# EAGLE board lte_cat_m1_shield_sara-r4-Panel (EAGLE 9.1.2), part 1 of 3
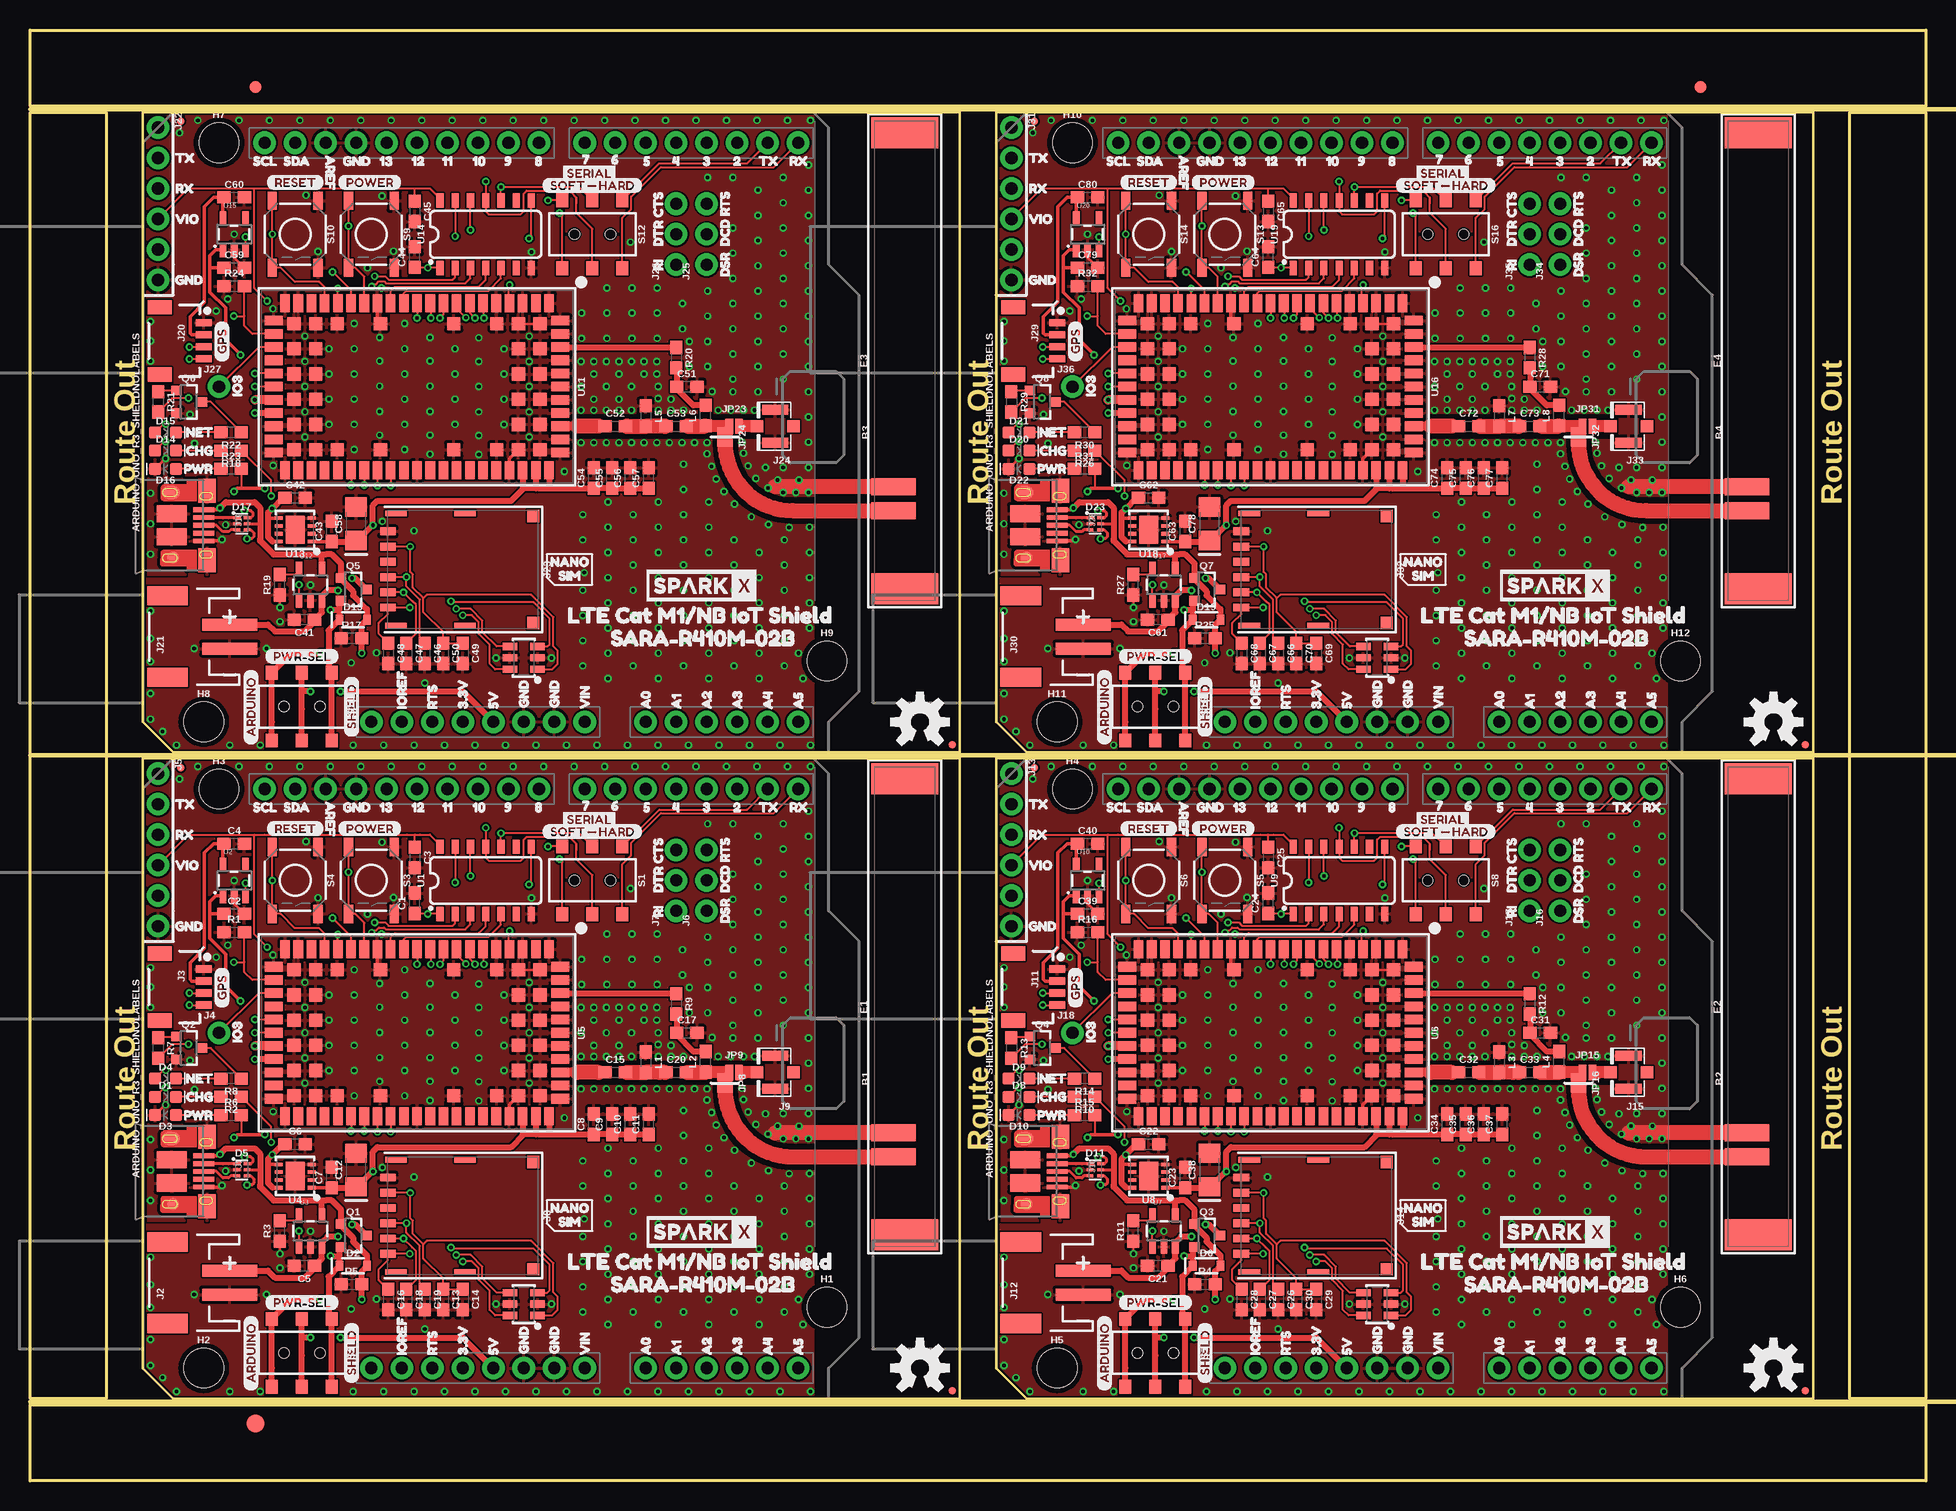
[diagram p0: board, top side]
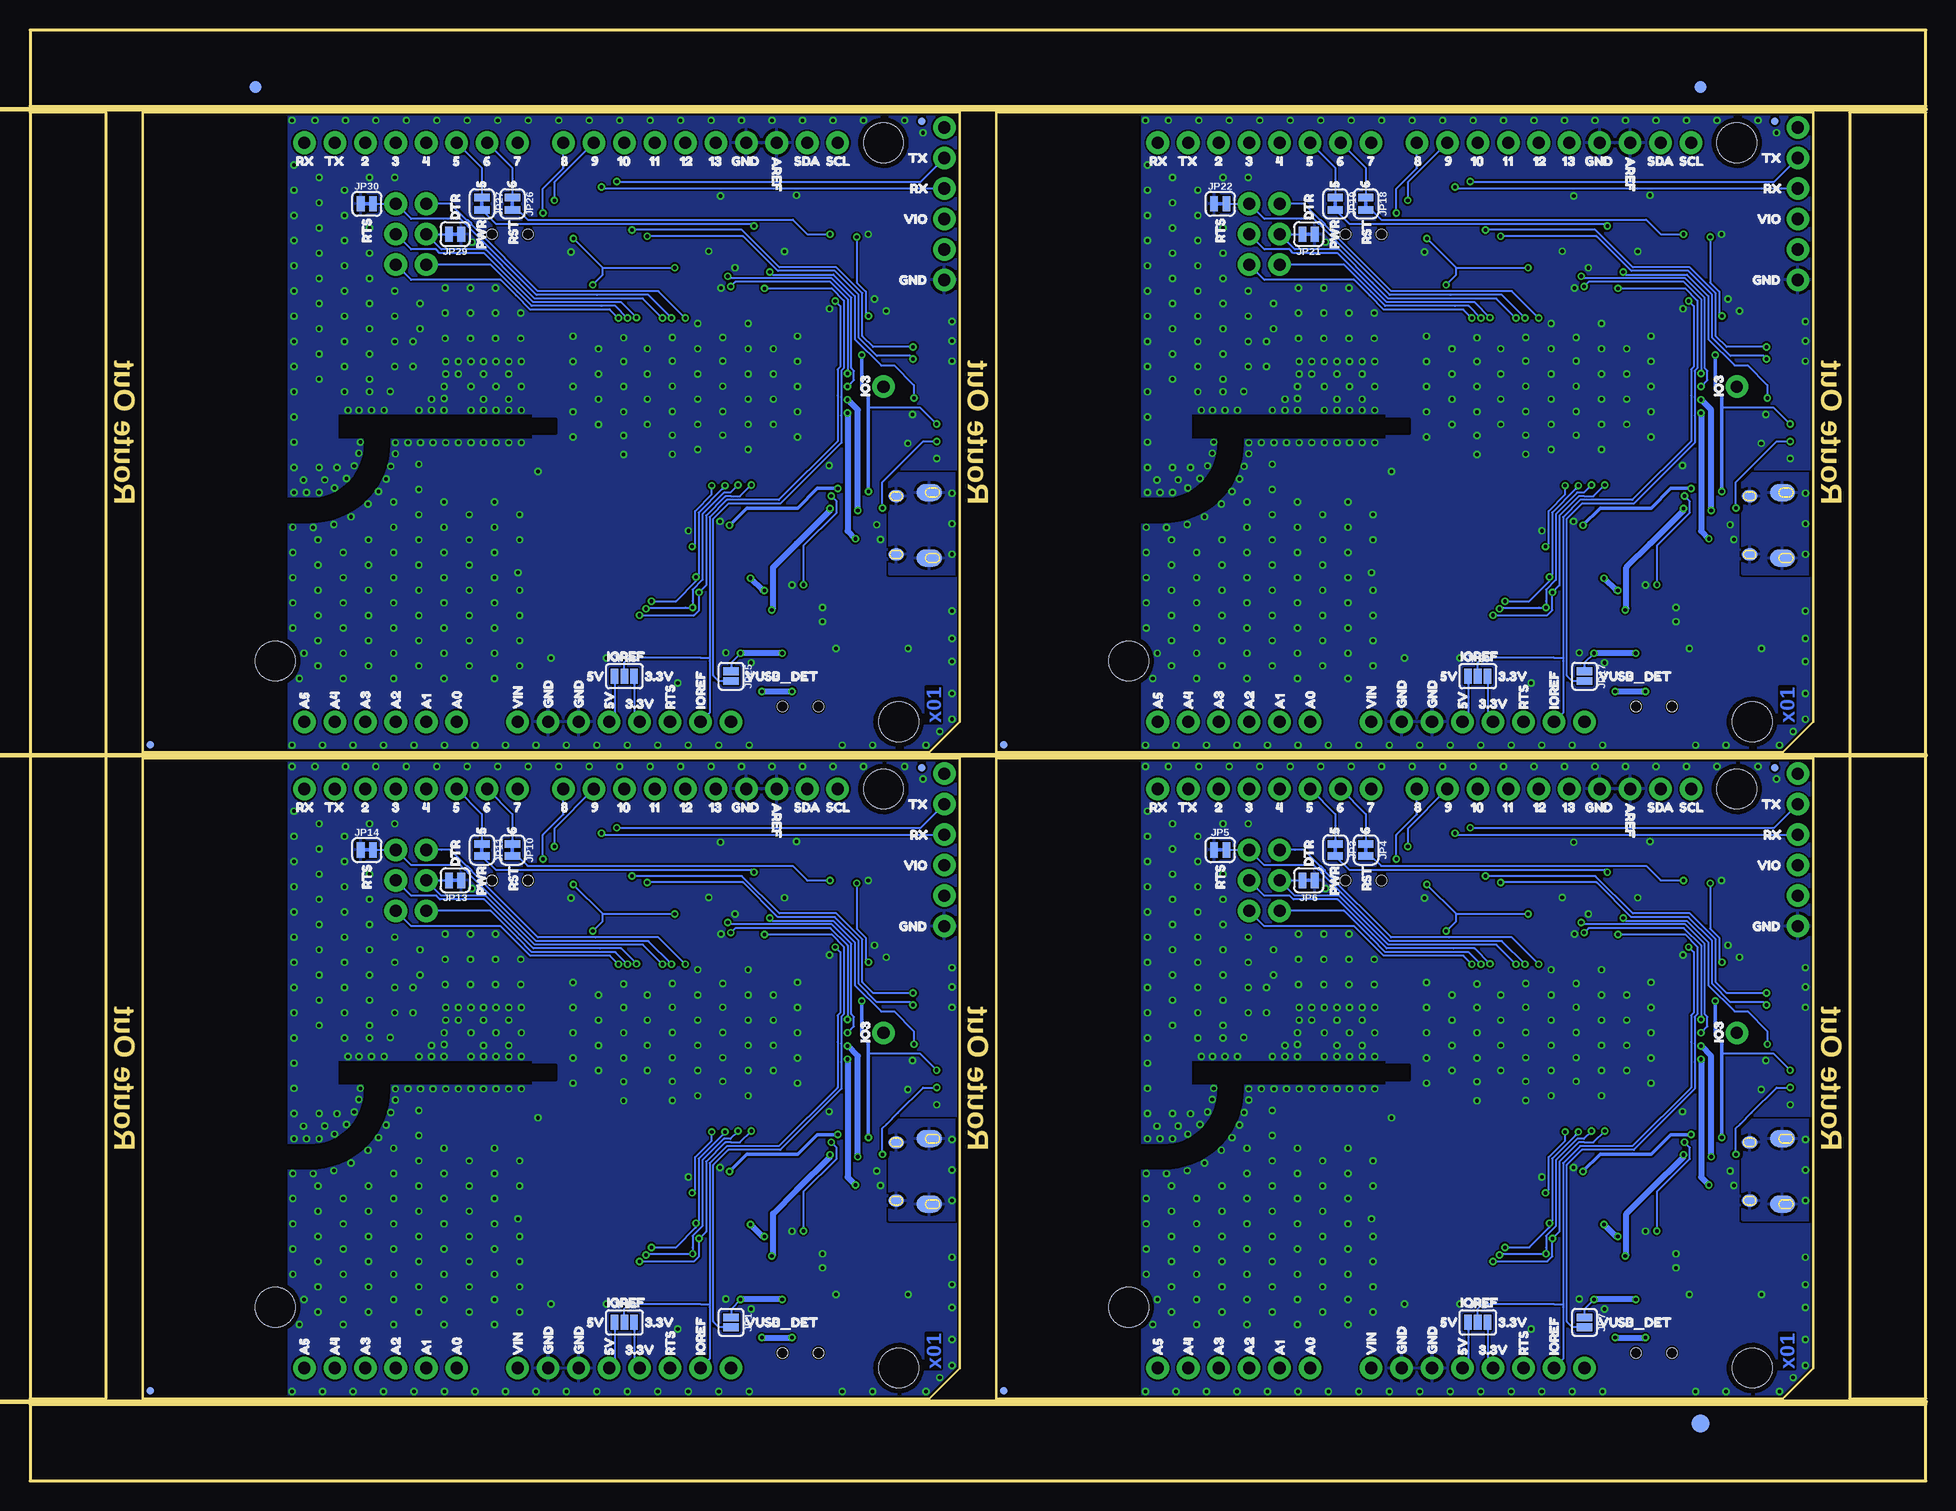
[diagram p1: board, bottom side, seen from below]

Size 157.99 x 120.9 mm. Coordinates in mm from the lower left corner, seen from the top.
Outline: 9.4,9.4 11.94,6.86 77.47,6.86 77.47,60.2 9.4,60.2 9.4,9.4
Outline: 80.52,9.4 83.06,6.86 148.59,6.86 148.59,60.2 80.52,60.2 80.52,9.4
Outline: 9.4,63.25 11.94,60.71 77.47,60.71 77.47,114.05 9.4,114.05 9.4,63.25
Outline: 80.52,63.25 83.06,60.71 148.59,60.71 148.59,114.05 80.52,114.05 80.52,63.25
Outline: 0,6.35 157.99,6.35 157.99,0 0,0 0,6.35
Outline: 151.64,114.05 157.99,114.05 157.99,6.86 151.64,6.86 151.64,114.05
Outline: 0,120.9 157.99,120.9 157.99,114.55 0,114.55 0,120.9
Outline: 0,114.05 6.35,114.05 6.35,6.86 0,6.86 0,114.05
Copper layers (1*16): Top 0.035mm / dielectric 1.5mm / Bottom 0.035mm
Design rules "SparkFun-2-layer-PCBWay-LIMIT": minimum track width 6mil, minimum drill 0.3mm, track to track 6mil, track to pad 6mil, pad to pad 6mil, via to via 6mil, smd to smd 6mil, copper to edge 6mil, drill to drill 6mil, minimum pad ring 6mil, minimum via ring 6mil, stop-mask expansion 4mil, vias tented up to drill 25mil, thermal gap 10mil
Net classes: 1 USB_Data: width 0.152 mm, drill 0.305 mm, clearance 0.152 mm
Milling: 3 lines

## Footprints (pad centres in the part's own frame; a part is rotated, then mirrored left to right if it is on the bottom)
UNO_R3_SHIELD_NOLABELS = drill 1.016 pad 1.88: 3.3V 24.13,-3.81; 5V 24.13,-1.27; A0 24.13,11.43; A1 24.13,13.97; A2 24.13,16.51; A3 24.13,19.05; A4 24.13,21.59; A5 24.13,24.13; AREF -24.13,-15.24; D2 -24.13,19.05; D3 -24.13,16.51; D4 -24.13,13.97; D5 -24.13,11.43; D6 -24.13,8.89; D7 -24.13,6.35; D8 -24.13,2.54; D9 -24.13,0; D10 -24.13,-2.54; D11 -24.13,-5.08; D12 -24.13,-7.62; D13 -24.13,-10.16; GND@0 24.13,1.27; GND@1 24.13,3.81; GND@2 -24.13,-12.7; IOREF 24.13,-8.89; NC 24.13,-11.43; RES 24.13,-6.35; RX -24.13,24.13; SCL -24.13,-20.32; SDA -24.13,-17.78; TX -24.13,21.59; VIN 24.13,6.35
0603 = smd 1.1 x 1: 1 -0.85,0; 2 0.85,0
1206-POLAR = smd 1.6 x 1.8: 1 -1.4,0; 2 1.4,0
LED-0603 = smd 1 x 1: A -0.877,0; C 0.877,0
SOD-323 = smd 0.63 x 0.83: A 1.15,0; C -1.15,0
SOT886 = smd 0.61 x 0.25: 1 -0.405,0.5 | smd 0.56 x 0.25: 2 -0.43,0; 3 -0.43,-0.5; 4 0.43,-0.5; 5 0.43,0; 6 0.43,0.5
SOT23-6L = smd 0.6 x 1.2: 1 -0.95,-1.15; 2 0,-1.15; 3 0.95,-1.15; 4 0.95,1.15; 5 0,1.15; 6 -0.95,1.15
MOLEX_146200 = smd 1.4 x 3.7: FEED 12.5,-0.95; GND 10.5,-0.95 | smd 2.6 x 5.6: MNT1 -19,0; MNT2 19,0
FIDUCIAL-1X2 = smd 1 x 1: 1 0,0
FIDUCIAL-1.5X3 = smd 1.5 x 1.5: 1 0,0
FIDUCIAL-MICRO = smd 0.635 x 0.635: 1 0,0
STAND-OFF = hole 3.302: 0,0
USB-MICROB-PTH-MILL = smd 0.4 x 1.75: D+ 0,0; D- -0.65,0; GND 1.3,0; ID 0.65,0; VBUS -1.3,0 | smd 2 x 1.46: SHIELD -2.9,0.275; SHIELD2 2.9,0.275 | smd 1.425 x 2.5: SHIELD3 -0.963,-2.675; SHIELD4 0.963,-2.675 | smd 1.4 x 2.1 bottom: SHIELD5 -2.731,-2.531; SHIELD7 2.729,-2.531 | smd 1 x 1: SHIELD6 2.7,-2.575 | smd 1.1 x 1.5: SHIELD8 -2.731,-2.731 | smd 1 x 1.3 bottom: SHIELD9 -2.43,0.195; SHIELD10 2.43,0.195
JST-2-SMD = smd 1 x 4.6: 1 -1,-3.7; 2 1,-3.7 | smd 1.6 x 3.4: NC1 -3.4,1.5; NC2 3.4,1.5
1X04_1MM_RA = smd 0.6 x 1.35: 1 -1.5,0; 2 -0.5,0; 3 0.5,0; 4 1.5,0 | smd 1.2 x 2: NC1 2.8,-3.675; NC2 -2.8,-3.675
1X01_NO_SILK = drill 1.016 pad 1.88: 1 0,0
1X06_NO_SILK = drill 1.016 pad 1.88: 1 0,0; 2 2.54,0; 3 5.08,0; 4 7.62,0; 5 10.16,0; 6 12.7,0
1X03_NO_SILK = drill 1.016 pad 1.88: 1 0,0; 2 2.54,0; 3 5.08,0
NANO_SIM_WURTH_693043020611 = smd 0.65 x 1.3: C1 1.905,6.25; C2 -0.635,6.25; C3 -1.905,6.25; C5 3.175,6.25; C6 0.635,6.25; C7 -3.175,6.25 | smd 0.48 x 1.8: MNT1 -4.69,5.58; MNT2 4.66,5.58; MNT3 -4.69,-0.17; MNT4 4.66,-0.17 | smd 1.03 x 1: MNT5 -4.465,-5.89; MNT6 4.465,-5.89
U.FL = smd 2.2 x 0.85: 1 0,1.375; 2 0,-1.375 | smd 1.05 x 1: FEED 1.525,0; NC -1.525,0
SMT-JUMPER_2_NO_SILK = smd 0.635 x 1.27: 1 -0.406,0; 2 0.406,0
SMT-JUMPER_3_NO_SILK = smd 0.635 x 1.27: 1 -0.813,0; 2 0,0; 3 0.813,0
SMT-JUMPER_2_NC_TRACE_SILK = smd 0.635 x 1.27: 1 -0.508,0; 2 0.508,0
SMT-JUMPER_2_NC_TRACE_NO-SILK = smd 0.635 x 1.27: 1 -0.508,0; 2 0.508,0
SMT-JUMPER_2_NO_NO-SILK = smd 0.635 x 1.27: 1 -0.406,0; 2 0.406,0
SOT23-3 = smd 0.8 x 0.9: 1 -0.95,-1; 2 0.95,-1; 3 0,1.1
SWITCH_DPDT_SMD_AYZ0202 = smd 1 x 1.15: 1 -2.5,2.825; 2 0,2.825; 3 2.5,2.825; 4 -2.5,-2.825; 5 0,-2.825; 6 2.5,-2.825 | hole 0.85: 1.5,0; -1.5,0
TACTILE_SWITCH_SMD_5.2MM = smd 1.524 x 0.762: 1 -2.794,1.905; 2 2.794,1.905; 3 -2.794,-1.905; 4 2.794,-1.905
SO14 = smd 0.6 x 1.2: 1 -3.81,-2.8; 2 -2.54,-2.8; 3 -1.27,-2.8; 4 0,-2.8; 5 1.27,-2.8; 6 2.54,-2.8; 7 3.81,-2.8; 8 3.81,2.8; 9 2.54,2.8; 10 1.27,2.8; 11 0,2.8; 12 -1.27,2.8; 13 -2.54,2.8; 14 -3.81,2.8
SOT23-5 = smd 0.55 x 1.2: 1 -0.95,-1.3; 2 0,-1.3; 3 0.95,-1.3; 4 0.95,1.3; 5 -0.95,1.3
8-UDFN = smd 0.3 x 0.65: 1 -0.975,-1.375; 2 -0.325,-1.375; 3 0.325,-1.375; 4 0.975,-1.375; 5 0.975,1.375; 6 0.325,1.375; 7 -0.325,1.375; 8 -0.975,1.375 | smd 2.35 x 1.6: EP 0,0
SARA-LGA = smd 0.8 x 1.5: 1 -11,-6.95; 2 -9.9,-6.95; 3 -8.8,-6.95; 4 -7.7,-6.95; 5 -6.6,-6.95; 6 -5.5,-6.95; 7 -4.4,-6.95; 8 -3.3,-6.95; 9 -2.2,-6.95; 10 -1.1,-6.95; 11 0,-6.95; 12 1.1,-6.95; 13 2.2,-6.95; 14 3.3,-6.95; 15 4.4,-6.95; 16 5.5,-6.95; 17 6.6,-6.95; 18 7.7,-6.95; 19 8.8,-6.95; 20 9.9,-6.95; 21 11,-6.95; 33 11,6.95; 34 9.9,6.95; 35 8.8,6.95; 36 7.7,6.95; 37 6.6,6.95; 38 5.5,6.95; 39 4.4,6.95; 40 3.3,6.95; 41 2.2,6.95; 42 1.1,6.95; 43 0,6.95; 44 -1.1,6.95; 45 -2.2,6.95; 46 -3.3,6.95; 47 -4.4,6.95; 48 -5.5,6.95; 49 -6.6,6.95; 50 -7.7,6.95; 51 -8.8,6.95; 52 -9.9,6.95; 53 -11,6.95 | smd 1.5 x 0.8: 22 11.95,-5.5; 23 11.95,-4.4; 24 11.95,-3.3; 25 11.95,-2.2; 26 11.95,-1.1; 27 11.95,0; 28 11.95,1.1; 29 11.95,2.2; 30 11.95,3.3; 31 11.95,4.4; 32 11.95,5.5; 54 -11.95,5.5; 55 -11.95,4.4; 56 -11.95,3.3; 57 -11.95,2.2; 58 -11.95,1.1; 59 -11.95,0; 60 -11.95,-1.1; 61 -11.95,-2.2; 62 -11.95,-3.3; 63 -11.95,-4.4; 64 -11.95,-5.5 | smd 1.1 x 1.1: 65 -10.25,-5.25; 66 -10.25,-3.15; 67 -10.25,-1.05; 68 -10.25,1.05; 69 -10.25,3.15; 70 -10.25,5.25; 71 -8.45,-5.25; 72 -8.45,-3.15; 73 -8.45,-1.05; 74 -8.45,1.05; 75 -8.45,3.15; 76 -8.45,5.25; 77 -6.65,-5.25; 78 -6.65,5.25; 79 -3.05,-5.25; 80 -3.05,5.25; 81 3.05,-5.25; 82 3.05,5.25; 83 6.65,-5.25; 84 6.65,5.25; 85 8.45,-5.25; 86 8.45,-3.15; 87 8.45,-1.05; 88 8.45,1.05; 89 8.45,3.15; 90 8.45,5.25; 91 10.25,-5.25; 92 10.25,-3.15; 93 10.25,-1.05; 94 10.25,1.05; 95 10.25,3.15; 96 10.25,5.25

## Placement (x,y rotation side)
B1  ARDUINO_UNO_R3_SHIELDNOLABELS  [UNO_R3_SHIELD_NOLABELS]  39.88,33.53 270 top
B2  ARDUINO_UNO_R3_SHIELDNOLABELS  [UNO_R3_SHIELD_NOLABELS]  111,33.53 270 top
B3  ARDUINO_UNO_R3_SHIELDNOLABELS  [UNO_R3_SHIELD_NOLABELS]  39.88,87.38 270 top
B4  ARDUINO_UNO_R3_SHIELDNOLABELS  [UNO_R3_SHIELD_NOLABELS]  111,87.38 270 top
C1  0.1uF  [0603]  32.06,48.13 90 top
C2  1.0uF  [0603]  17.02,47.24 0 top
C3  0.1uF  [0603]  32.06,51.94 270 top
C4  1.0uF  [0603]  17.02,53.11 0 top
C5  4.7uF  [0603]  22.86,17.91 180 top
C6  4.7uF  [0603]  22.1,28.07 0 top
C7  4.7uF  [0603]  25.15,25.27 90 top
C8  0.1uF  [0603]  46.99,29.72 90 top
C9  10nF  [0603]  48.51,29.72 90 top
C10  15pF  [0603]  50.04,29.72 90 top
C11  68pF  [0603]  51.56,29.72 90 top
C12  100uF  [1206-POLAR]  27.18,25.91 90 top
C13  0.1uF  [0603]  34.42,15.11 270 top
C14  47pF  [0603]  36.07,15.11 270 top
C15  15pF  [0603]  48.77,34.04 0 top
C16  47pF  [0603]  29.84,15.11 270 top
C17  27pF  [0603]  54.74,37.34 0 top
C18  47pF  [0603]  31.37,15.11 270 top
C19  47pF  [0603]  32.89,15.11 270 top
C20  33pF  [0603]  53.85,34.04 0 top
C21  4.7uF  [0603]  93.98,17.91 180 top
C22  4.7uF  [0603]  93.22,28.07 0 top
C23  4.7uF  [0603]  96.27,25.27 90 top
C24  0.1uF  [0603]  103.18,48.13 90 top
C25  0.1uF  [0603]  103.18,51.94 270 top
C26  47pF  [0603]  104.01,15.11 270 top
C27  47pF  [0603]  102.49,15.11 270 top
C28  47pF  [0603]  100.96,15.11 270 top
C29  47pF  [0603]  107.19,15.11 270 top
C30  0.1uF  [0603]  105.54,15.11 270 top
C31  27pF  [0603]  125.86,37.34 0 top
C32  15pF  [0603]  119.89,34.04 0 top
C33  33pF  [0603]  124.97,34.04 0 top
C34  0.1uF  [0603]  118.11,29.72 90 top
C35  10nF  [0603]  119.63,29.72 90 top
C36  15pF  [0603]  121.16,29.72 90 top
C37  68pF  [0603]  122.68,29.72 90 top
C38  100uF  [1206-POLAR]  98.3,25.91 90 top
C39  1.0uF  [0603]  88.14,47.24 0 top
C40  1.0uF  [0603]  88.14,53.11 0 top
C41  4.7uF  [0603]  22.86,71.76 180 top
C42  4.7uF  [0603]  22.1,81.92 0 top
C43  4.7uF  [0603]  25.15,79.12 90 top
C44  0.1uF  [0603]  32.06,101.98 90 top
C45  0.1uF  [0603]  32.06,105.79 270 top
C46  47pF  [0603]  32.89,68.96 270 top
C47  47pF  [0603]  31.37,68.96 270 top
C48  47pF  [0603]  29.84,68.96 270 top
C49  47pF  [0603]  36.07,68.96 270 top
C50  0.1uF  [0603]  34.42,68.96 270 top
C51  27pF  [0603]  54.74,91.19 0 top
C52  15pF  [0603]  48.77,87.89 0 top
C53  33pF  [0603]  53.85,87.89 0 top
C54  0.1uF  [0603]  46.99,83.57 90 top
C55  10nF  [0603]  48.51,83.57 90 top
C56  15pF  [0603]  50.04,83.57 90 top
C57  68pF  [0603]  51.56,83.57 90 top
C58  100uF  [1206-POLAR]  27.18,79.76 90 top
C59  1.0uF  [0603]  17.02,101.09 0 top
C60  1.0uF  [0603]  17.02,106.96 0 top
C61  4.7uF  [0603]  93.98,71.76 180 top
C62  4.7uF  [0603]  93.22,81.92 0 top
C63  4.7uF  [0603]  96.27,79.12 90 top
C64  0.1uF  [0603]  103.18,101.98 90 top
C65  0.1uF  [0603]  103.18,105.79 270 top
C66  47pF  [0603]  104.01,68.96 270 top
C67  47pF  [0603]  102.49,68.96 270 top
C68  47pF  [0603]  100.96,68.96 270 top
C69  47pF  [0603]  107.19,68.96 270 top
C70  0.1uF  [0603]  105.54,68.96 270 top
C71  27pF  [0603]  125.86,91.19 0 top
C72  15pF  [0603]  119.89,87.89 0 top
C73  33pF  [0603]  124.97,87.89 0 top
C74  0.1uF  [0603]  118.11,83.57 90 top
C75  10nF  [0603]  119.63,83.57 90 top
C76  15pF  [0603]  121.16,83.57 90 top
C77  68pF  [0603]  122.68,83.57 90 top
C78  100uF  [1206-POLAR]  98.3,79.76 90 top
C79  1.0uF  [0603]  88.14,101.09 0 top
C80  1.0uF  [0603]  88.14,106.96 0 top
D1  Yellow  [LED-0603]  11.3,32 0 top
D2  1A/23V/620mV  [SOD-323]  26.92,17.91 0 top
D3  RED  [LED-0603]  11.3,30.48 180 top
D4  BLUE  [LED-0603]  11.3,33.53 0 top
D5  PRTR5V0U2F  [SOT886]  17.65,25.91 0 top
D6  1A/23V/620mV  [SOD-323]  98.04,17.91 0 top
D7  DT1042-04SO-7  [SOT23-6L]  41.15,14.73 90 top
D8  Yellow  [LED-0603]  82.42,32 0 top
D9  BLUE  [LED-0603]  82.42,33.53 0 top
D10  RED  [LED-0603]  82.42,30.48 180 top
D11  PRTR5V0U2F  [SOT886]  88.77,25.91 0 top
D12  DT1042-04SO-7  [SOT23-6L]  112.27,14.73 90 top
D13  1A/23V/620mV  [SOD-323]  26.92,71.76 0 top
D14  Yellow  [LED-0603]  11.3,85.85 0 top
D15  BLUE  [LED-0603]  11.3,87.38 0 top
D16  RED  [LED-0603]  11.3,84.33 180 top
D17  PRTR5V0U2F  [SOT886]  17.65,79.76 0 top
D18  DT1042-04SO-7  [SOT23-6L]  41.15,68.58 90 top
D19  1A/23V/620mV  [SOD-323]  98.04,71.76 0 top
D20  Yellow  [LED-0603]  82.42,85.85 0 top
D21  BLUE  [LED-0603]  82.42,87.38 0 top
D22  RED  [LED-0603]  82.42,84.33 180 top
D23  PRTR5V0U2F  [SOT886]  88.77,79.76 0 top
D24  DT1042-04SO-7  [SOT23-6L]  112.27,68.58 90 top
E1  MOLEX-146200  [MOLEX_146200]  72.9,39.5 270 top
E2  MOLEX-146200  [MOLEX_146200]  144.02,39.5 270 top
E3  MOLEX-146200  [MOLEX_146200]  72.9,93.34 270 top
E4  MOLEX-146200  [MOLEX_146200]  144.02,93.34 270 top
E$1  [FIDUCIAL-1X2]  18.8,116.14 0 top
E$2  [FIDUCIAL-1X2]  18.8,116.14 0 bottom
E$3  [FIDUCIAL-1X2]  139.19,116.14 0 top
E$4  [FIDUCIAL-1X2]  139.19,116.14 0 bottom
E$5  [FIDUCIAL-1.5X3]  18.8,4.76 0 top
E$6  [FIDUCIAL-1.5X3]  18.8,4.76 0 bottom
FD1  FIDUCIALUFIDUCIAL  [FIDUCIAL-MICRO]  76.83,7.49 0 top
FD2  FIDUCIALUFIDUCIAL  [FIDUCIAL-MICRO]  12.57,59.44 0 top
FD3  FIDUCIALUFIDUCIAL  [FIDUCIAL-MICRO]  76.83,7.49 0 bottom
FD4  FIDUCIALUFIDUCIAL  [FIDUCIAL-MICRO]  12.57,59.44 0 bottom
FD5  FIDUCIALUFIDUCIAL  [FIDUCIAL-MICRO]  147.95,7.49 0 top
FD6  FIDUCIALUFIDUCIAL  [FIDUCIAL-MICRO]  83.69,59.44 0 top
FD7  FIDUCIALUFIDUCIAL  [FIDUCIAL-MICRO]  147.95,7.49 0 bottom
FD8  FIDUCIALUFIDUCIAL  [FIDUCIAL-MICRO]  83.69,59.44 0 bottom
FD9  FIDUCIALUFIDUCIAL  [FIDUCIAL-MICRO]  76.83,61.34 0 top
FD10  FIDUCIALUFIDUCIAL  [FIDUCIAL-MICRO]  12.57,113.28 0 top
FD11  FIDUCIALUFIDUCIAL  [FIDUCIAL-MICRO]  76.83,61.34 0 bottom
FD12  FIDUCIALUFIDUCIAL  [FIDUCIAL-MICRO]  12.57,113.28 0 bottom
FD13  FIDUCIALUFIDUCIAL  [FIDUCIAL-MICRO]  147.95,61.34 0 top
FD14  FIDUCIALUFIDUCIAL  [FIDUCIAL-MICRO]  83.69,113.28 0 top
FD15  FIDUCIALUFIDUCIAL  [FIDUCIAL-MICRO]  147.95,61.34 0 bottom
FD16  FIDUCIALUFIDUCIAL  [FIDUCIAL-MICRO]  83.69,113.28 0 bottom
H1  STAND-OFF  [STAND-OFF]  66.42,14.48 0 top
H2  STAND-OFF  [STAND-OFF]  14.48,9.4 0 top
H3  STAND-OFF  [STAND-OFF]  15.75,57.66 0 top
H4  STAND-OFF  [STAND-OFF]  86.87,57.66 0 top
H5  STAND-OFF  [STAND-OFF]  85.6,9.4 0 top
H6  STAND-OFF  [STAND-OFF]  137.54,14.48 0 top
H7  STAND-OFF  [STAND-OFF]  15.75,111.51 0 top
H8  STAND-OFF  [STAND-OFF]  14.48,63.25 0 top
H9  STAND-OFF  [STAND-OFF]  66.42,68.33 0 top
H10  STAND-OFF  [STAND-OFF]  86.87,111.51 0 top
H11  STAND-OFF  [STAND-OFF]  85.6,63.25 0 top
H12  STAND-OFF  [STAND-OFF]  137.54,68.33 0 top
J1  [USB-MICROB-PTH-MILL]  14.48,25.78 270 top
J2  [JST-2-SMD]  12.95,16.51 90 top
J3  [1X04_1MM_RA]  14.48,41.15 270 top
J4  [1X01_NO_SILK]  15.75,37.34 0 top
J5  [1X06_NO_SILK]  10.67,58.93 270 top
J6  [1X03_NO_SILK]  56.39,47.5 90 top
J7  [1X03_NO_SILK]  53.85,47.5 90 top
J8  NANO_SIM  [NANO_SIM_WURTH_693043020611]  36.07,22.1 90 top
J9  U.FL  [U.FL]  62.1,34.04 180 top
J10  [USB-MICROB-PTH-MILL]  85.6,25.78 270 top
J11  [1X04_1MM_RA]  85.6,41.15 270 top
J12  [JST-2-SMD]  84.07,16.51 90 top
J13  [1X06_NO_SILK]  81.79,58.93 270 top
J14  NANO_SIM  [NANO_SIM_WURTH_693043020611]  107.19,22.1 90 top
J15  U.FL  [U.FL]  133.22,34.04 180 top
J16  [1X03_NO_SILK]  127.51,47.5 90 top
J17  [1X03_NO_SILK]  124.97,47.5 90 top
J18  [1X01_NO_SILK]  86.87,37.34 0 top
J19  [USB-MICROB-PTH-MILL]  14.48,79.63 270 top
J20  [1X04_1MM_RA]  14.48,95 270 top
J21  [JST-2-SMD]  12.95,70.36 90 top
J22  [1X06_NO_SILK]  10.67,112.78 270 top
J23  NANO_SIM  [NANO_SIM_WURTH_693043020611]  36.07,75.95 90 top
J24  U.FL  [U.FL]  62.1,87.89 180 top
J25  [1X03_NO_SILK]  56.39,101.35 90 top
J26  [1X03_NO_SILK]  53.85,101.35 90 top
J27  [1X01_NO_SILK]  15.75,91.19 0 top
J28  [USB-MICROB-PTH-MILL]  85.6,79.63 270 top
J29  [1X04_1MM_RA]  85.6,95 270 top
J30  [JST-2-SMD]  84.07,70.36 90 top
J31  [1X06_NO_SILK]  81.79,112.78 270 top
J32  NANO_SIM  [NANO_SIM_WURTH_693043020611]  107.19,75.95 90 top
J33  U.FL  [U.FL]  133.22,87.89 180 top
J34  [1X03_NO_SILK]  127.51,101.35 90 top
J35  [1X03_NO_SILK]  124.97,101.35 90 top
J36  [1X01_NO_SILK]  86.87,91.19 0 top
JP1  VUSB_DET  [SMT-JUMPER_2_NO_SILK]  99.57,13.21 270 bottom
JP2  IOREF-SEL  [SMT-JUMPER_3_NO_SILK]  37.34,13.21 0 bottom
JP3  JUMPER-SMT_2_NC_TRACE_SILK  [SMT-JUMPER_2_NC_TRACE_SILK]  49.21,52.58 270 bottom
JP4  JUMPER-SMT_2_NC_TRACE_SILK  [SMT-JUMPER_2_NC_TRACE_SILK]  46.67,52.58 270 bottom
JP5  [SMT-JUMPER_2_NC_TRACE_SILK]  58.8,52.58 0 bottom
JP6  [SMT-JUMPER_2_NC_TRACE_SILK]  51.44,50.04 180 bottom
JP7  VUSB_DET  [SMT-JUMPER_2_NO_SILK]  28.45,13.21 270 bottom
JP8  J-CHIP  [SMT-JUMPER_2_NC_TRACE_NO-SILK]  57.91,33.15 270 top
JP9  J-U.FL  [SMT-JUMPER_2_NO_NO-SILK]  58.67,34.03 0 top
JP10  JUMPER-SMT_2_NC_TRACE_SILK  [SMT-JUMPER_2_NC_TRACE_SILK]  117.79,52.58 270 bottom
JP11  JUMPER-SMT_2_NC_TRACE_SILK  [SMT-JUMPER_2_NC_TRACE_SILK]  120.33,52.58 270 bottom
JP12  IOREF-SEL  [SMT-JUMPER_3_NO_SILK]  108.46,13.21 0 bottom
JP13  [SMT-JUMPER_2_NC_TRACE_SILK]  122.55,50.04 180 bottom
JP14  [SMT-JUMPER_2_NC_TRACE_SILK]  129.92,52.58 0 bottom
JP15  J-U.FL  [SMT-JUMPER_2_NO_NO-SILK]  129.79,34.03 0 top
JP16  J-CHIP  [SMT-JUMPER_2_NC_TRACE_NO-SILK]  129.03,33.15 270 top
JP17  VUSB_DET  [SMT-JUMPER_2_NO_SILK]  28.45,67.06 270 bottom
JP18  JUMPER-SMT_2_NC_TRACE_SILK  [SMT-JUMPER_2_NC_TRACE_SILK]  46.67,106.43 270 bottom
JP19  JUMPER-SMT_2_NC_TRACE_SILK  [SMT-JUMPER_2_NC_TRACE_SILK]  49.21,106.43 270 bottom
JP20  IOREF-SEL  [SMT-JUMPER_3_NO_SILK]  37.34,67.06 0 bottom
JP21  [SMT-JUMPER_2_NC_TRACE_SILK]  51.44,103.89 180 bottom
JP22  [SMT-JUMPER_2_NC_TRACE_SILK]  58.8,106.43 0 bottom
JP23  J-U.FL  [SMT-JUMPER_2_NO_NO-SILK]  58.67,87.88 0 top
JP24  J-CHIP  [SMT-JUMPER_2_NC_TRACE_NO-SILK]  57.91,87 270 top
JP25  VUSB_DET  [SMT-JUMPER_2_NO_SILK]  99.57,67.06 270 bottom
JP26  JUMPER-SMT_2_NC_TRACE_SILK  [SMT-JUMPER_2_NC_TRACE_SILK]  117.79,106.43 270 bottom
JP27  JUMPER-SMT_2_NC_TRACE_SILK  [SMT-JUMPER_2_NC_TRACE_SILK]  120.33,106.43 270 bottom
JP28  IOREF-SEL  [SMT-JUMPER_3_NO_SILK]  108.46,67.06 0 bottom
JP29  [SMT-JUMPER_2_NC_TRACE_SILK]  122.55,103.89 180 bottom
JP30  [SMT-JUMPER_2_NC_TRACE_SILK]  129.92,106.43 0 bottom
JP31  J-U.FL  [SMT-JUMPER_2_NO_NO-SILK]  129.79,87.88 0 top
JP32  J-CHIP  [SMT-JUMPER_2_NC_TRACE_NO-SILK]  129.03,87 270 top
L1  39nH  [0603]  51.31,34.88 270 top
L2  68nH  [0603]  56.3,34.92 90 top
L3  39nH  [0603]  122.43,34.88 270 top
L4  68nH  [0603]  127.42,34.92 90 top
L5  39nH  [0603]  51.31,88.73 270 top
L6  68nH  [0603]  56.3,88.77 90 top
L7  39nH  [0603]  122.43,88.73 270 top
L8  68nH  [0603]  127.42,88.77 90 top
LOGO1  SPARKX-LOGO4  [SPARKX-MEDIUM]  55.96,20.75 0 top
LOGO2  OSHW-LOGOM  [OSHW-LOGO-M]  74.17,9.4 0 top
LOGO3  SPARKX-LOGO4  [SPARKX-MEDIUM]  127.08,20.75 0 top
LOGO4  OSHW-LOGOM  [OSHW-LOGO-M]  145.29,9.4 0 top
LOGO5  SPARKX-LOGO4  [SPARKX-MEDIUM]  55.96,74.6 0 top
LOGO6  OSHW-LOGOM  [OSHW-LOGO-M]  74.17,63.25 0 top
LOGO7  SPARKX-LOGO4  [SPARKX-MEDIUM]  127.08,74.6 0 top
LOGO8  OSHW-LOGOM  [OSHW-LOGO-M]  145.29,63.25 0 top
Q1  2.5A/30V/105mΩ  [SOT23-3]  26.92,20.45 270 top
Q2  600mA/40V  [SOT23-3]  13.21,36.07 270 top
Q3  2.5A/30V/105mΩ  [SOT23-3]  98.04,20.45 270 top
Q4  600mA/40V  [SOT23-3]  84.33,36.07 270 top
Q5  2.5A/30V/105mΩ  [SOT23-3]  26.92,74.3 270 top
Q6  600mA/40V  [SOT23-3]  13.21,89.92 270 top
Q7  2.5A/30V/105mΩ  [SOT23-3]  98.04,74.3 270 top
Q8  600mA/40V  [SOT23-3]  84.33,89.92 270 top
R1  47k  [0603]  17.02,45.72 0 top
R2  1k  [0603]  16.76,32 180 top
R3  2.0k  [0603]  20.83,20.83 90 top
R4  10k  [0603]  97.92,16.38 0 top
R5  10k  [0603]  26.8,16.38 0 top
R6  1k  [0603]  16.76,30.48 0 top
R7  10k  [0603]  10.67,36.07 270 top
R8  1k  [0603]  16.76,33.53 180 top
R9  10k  [0603]  53.85,39.75 270 top
R10  1k  [0603]  87.88,32 180 top
R11  2.0k  [0603]  91.95,20.83 90 top
R12  10k  [0603]  124.97,39.75 270 top
R13  10k  [0603]  81.79,36.07 270 top
R14  1k  [0603]  87.88,33.53 180 top
R15  1k  [0603]  87.88,30.48 0 top
R16  47k  [0603]  88.14,45.72 0 top
R17  10k  [0603]  26.8,70.23 0 top
R18  1k  [0603]  16.76,85.85 180 top
R19  2.0k  [0603]  20.83,74.68 90 top
R20  10k  [0603]  53.85,93.6 270 top
R21  10k  [0603]  10.67,89.92 270 top
R22  1k  [0603]  16.76,87.38 180 top
R23  1k  [0603]  16.76,84.33 0 top
R24  47k  [0603]  17.02,99.57 0 top
R25  10k  [0603]  97.92,70.23 0 top
R26  1k  [0603]  87.88,85.85 180 top
R27  2.0k  [0603]  91.95,74.68 90 top
R28  10k  [0603]  124.97,93.6 270 top
R29  10k  [0603]  81.79,89.92 270 top
R30  1k  [0603]  87.88,87.38 180 top
R31  1k  [0603]  87.88,84.33 0 top
R32  47k  [0603]  88.14,99.57 0 top
S1  [SWITCH_DPDT_SMD_AYZ0202]  46.86,50.04 180 top
S2  [SWITCH_DPDT_SMD_AYZ0202]  22.66,10.67 180 top
S3  PWR_ON  [TACTILE_SWITCH_SMD_5.2MM]  28.45,50.04 270 top
S4  RESET  [TACTILE_SWITCH_SMD_5.2MM]  22.1,50.04 270 top
S5  PWR_ON  [TACTILE_SWITCH_SMD_5.2MM]  99.57,50.04 270 top
S6  RESET  [TACTILE_SWITCH_SMD_5.2MM]  93.22,50.04 270 top
S7  [SWITCH_DPDT_SMD_AYZ0202]  93.78,10.67 180 top
S8  [SWITCH_DPDT_SMD_AYZ0202]  117.98,50.04 180 top
S9  PWR_ON  [TACTILE_SWITCH_SMD_5.2MM]  28.45,103.89 270 top
S10  RESET  [TACTILE_SWITCH_SMD_5.2MM]  22.1,103.89 270 top
S11  [SWITCH_DPDT_SMD_AYZ0202]  22.66,64.52 180 top
S12  [SWITCH_DPDT_SMD_AYZ0202]  46.86,103.89 180 top
S13  PWR_ON  [TACTILE_SWITCH_SMD_5.2MM]  99.57,103.89 270 top
S14  RESET  [TACTILE_SWITCH_SMD_5.2MM]  93.22,103.89 270 top
S15  [SWITCH_DPDT_SMD_AYZ0202]  93.78,64.52 180 top
S16  [SWITCH_DPDT_SMD_AYZ0202]  117.98,103.89 180 top
U1  TXB0104  [SO14]  37.97,50.04 0 top
U2  AP2112K-3.3  [SOT23-5]  17.02,50.04 0 top
U3  MCP73831  [SOT23-5]  23.37,20.83 0 top
U4  AP7361C-33FGE  [8-UDFN]  22.1,25.4 90 top
U5  SARA-R410M-2B  [SARA-LGA]  32.26,37.34 180 top
U6  SARA-R410M-2B  [SARA-LGA]  103.38,37.34 180 top
U7  MCP73831  [SOT23-5]  94.49,20.83 0 top
U8  AP7361C-33FGE  [8-UDFN]  93.22,25.4 90 top
U9  TXB0104  [SO14]  109.09,50.04 0 top
U10  AP2112K-3.3  [SOT23-5]  88.14,50.04 0 top
U11  SARA-R410M-2B  [SARA-LGA]  32.26,91.19 180 top
U12  MCP73831  [SOT23-5]  23.37,74.68 0 top
U13  AP7361C-33FGE  [8-UDFN]  22.1,79.25 90 top
U14  TXB0104  [SO14]  37.97,103.89 0 top
U15  AP2112K-3.3  [SOT23-5]  17.02,103.89 0 top
U16  SARA-R410M-2B  [SARA-LGA]  103.38,91.19 180 top
U17  MCP73831  [SOT23-5]  94.49,74.68 0 top
U18  AP7361C-33FGE  [8-UDFN]  93.22,79.25 90 top
U19  TXB0104  [SO14]  109.09,103.89 0 top
U20  AP2112K-3.3  [SOT23-5]  88.14,103.89 0 top
U$1  [SCL0]  17.91,56.13 0 top
U$2  [SDA1]  20.45,56.13 0 top
U$3  [AREF2]  25.02,57.28 270 top
U$4  [GND3]  25.4,56.13 0 top
U$5  [134]  28.45,56.13 0 top
U$6  [125]  31.11,56.13 0 top
U$7  [116]  33.53,56.13 0 top
U$8  [107]  36.2,56.13 0 top
U$9  [98]  38.86,56.13 0 top
U$10  [89]  41.4,56.13 0 top
U$11  [RESET48]  19.69,54.36 0 top
U$12  [GPS47]  16,39.37 90 top
U$13  [714]  45.34,56.26 0 top
U$14  [615]  47.75,56.26 0 top
U$15  [516]  50.42,56.13 0 top
U$16  [417]  52.83,56.13 0 top
U$17  [318]  55.25,56.13 0 top
U$18  [219]  57.91,56.13 0 top
U$19  [POWER49]  25.65,54.36 0 top
U$20  [RX22]  62.61,56.13 0 top
U$21  [TX21]  60.07,56.13 0 top
U$22  [SERIAL57]  44.07,55.12 0 top
U$23  [CTS23]  52.35,50.75 90 top
U$24  [DTR24]  52.35,48.34 90 top
U$25  [RI25]  52.35,46.3 90 top
U$26  [DSR26]  57.91,45.8 90 top
U$27  [DCD27]  57.91,48.34 90 top
U$28  [RTS28]  57.91,50.88 90 top
U$29  [VIO29]  11.43,51.31 0 top
U$30  [RX22]  11.43,53.85 0 top
U$31  [TX21]  11.43,56.39 0 top
U$32  [LTE_CAT_M1#NB_IOT_SHIELD55]  43.69,18.29 0 top
U$33  [ARDUINO51]  18.41,7.49 90 top
U$34  [IO334]  17.27,35.81 90 top
U$35  [NET31]  12.29,33.53 0 top
U$36  [CHG33]  12.32,32 0 top
U$37  [PWR32]  12.14,30.48 0 top
U$38  [PWR#SEL53]  19.56,14.86 0 top
U$39  [SHIELD52]  26.8,8.13 90 top
U$40  [SCL0]  89.03,56.13 0 top
U$41  [IOREF39]  30.99,9.78 90 top
U$42  [RTS28]  33.53,9.78 90 top
U$43  [3#3V41]  36.07,9.8 90 top
U$44  [5V42]  38.61,9.8 90 top
U$45  [GND3]  41.15,9.91 90 top
U$46  [GND3]  43.69,9.91 90 top
U$47  [VIN43]  46.23,9.8 90 top
U$48  [A044]  51.31,9.8 90 top
U$49  [A145]  53.85,9.8 90 top
U$50  [A246]  56.39,9.8 90 top
U$51  [A347]  58.93,9.8 90 top
U$52  [A448]  61.47,9.8 90 top
U$53  [A549]  64.01,9.8 90 top
U$54  [NANO50]  42.67,22.73 0 top
U$55  [SIM51]  43.36,21.59 0 top
U$56  [IOREF39]  39.5,14.86 0 bottom
U$57  [5V42]  41.15,13.21 0 bottom
U$58  [3#3V41]  36.32,13.21 0 bottom
U$59  [PWR32]  49.28,48.13 90 bottom
U$60  [RST40]  46.61,48.51 90 bottom
U$61  [516]  49.28,53.21 90 bottom
U$62  [615]  46.74,53.21 90 bottom
U$63  [DTR24]  51.44,50.55 90 bottom
U$64  [RTS28]  58.8,48.64 90 bottom
U$65  [VUSB_DET52]  27.94,13.21 0 bottom
U$66  [A549]  64.01,9.8 90 bottom
U$67  [A448]  61.47,9.8 90 bottom
U$68  [A347]  58.93,9.8 90 bottom
U$69  [A246]  56.39,9.8 90 bottom
U$70  [A145]  53.85,9.8 90 bottom
U$71  [A044]  51.31,9.8 90 bottom
U$72  [VIN43]  46.23,9.8 90 bottom
U$73  [GND3]  43.69,9.91 90 bottom
U$74  [GND3]  41.15,9.91 90 bottom
U$75  [5V42]  38.61,9.8 90 bottom
U$76  [3#3V41]  37.95,10.92 0 bottom
U$77  [RTS28]  33.53,9.78 90 bottom
U$78  [IOREF39]  30.99,9.78 90 bottom
U$79  [IO334]  17.27,35.81 90 bottom
U$80  [TX21]  14.35,56.39 0 bottom
U$81  [RX22]  14.22,53.85 0 bottom
U$82  [VIO29]  14.73,51.31 0 bottom
U$83  [SARA#R410M#02B54]  47.24,16.38 0 top
U$84  [SDA1]  23.88,56.13 0 bottom
U$85  [SCL0]  21.21,56.13 0 bottom
U$86  [AREF2]  24.64,57.15 270 bottom
U$87  [134]  30.99,56.13 0 bottom
U$88  [GND3]  29.08,56.13 0 bottom
U$89  [125]  33.4,56.13 0 bottom
U$90  [116]  36.07,56.13 0 bottom
U$91  [107]  38.61,56.13 0 bottom
U$92  [98]  40.77,56.13 0 bottom
U$93  [89]  43.31,56.13 0 bottom
U$94  [714]  47.24,56.13 0 bottom
U$95  [615]  49.78,56.13 0 bottom
U$96  [516]  52.32,56.13 0 bottom
U$97  [417]  54.86,56.13 0 bottom
U$98  [318]  57.53,56.13 0 bottom
U$99  [219]  59.94,56.13 0 bottom
U$100  [TX21]  62.99,56.13 0 bottom
U$101  [RX22]  65.41,56.13 0 bottom
U$102  [SOFT#HARD50]  42.67,54.1 0 top
U$103  [SDA1]  91.57,56.13 0 top
U$104  [GND3]  11.43,46.23 0 top
U$105  [GND3]  15.11,46.23 0 bottom
U$106  [AREF2]  96.14,57.28 270 top
U$107  [GND3]  96.52,56.13 0 top
U$108  [134]  99.57,56.13 0 top
U$109  [125]  102.23,56.13 0 top
U$110  [116]  104.65,56.13 0 top
U$111  [107]  107.31,56.13 0 top
U$112  [98]  109.98,56.13 0 top
U$113  [89]  112.52,56.13 0 top
U$114  [714]  116.46,56.26 0 top
U$115  [615]  118.87,56.26 0 top
U$116  [516]  121.54,56.13 0 top
U$117  [417]  123.95,56.13 0 top
U$118  [318]  126.36,56.13 0 top
U$119  [219]  129.03,56.13 0 top
U$120  [RX22]  133.73,56.13 0 top
U$121  [TX21]  131.19,56.13 0 top
U$122  [CTS23]  123.47,50.75 90 top
U$123  [DTR24]  123.47,48.34 90 top
U$124  [RI25]  123.47,46.3 90 top
U$125  [DSR26]  129.03,45.8 90 top
U$126  [DCD27]  129.03,48.34 90 top
U$127  [RTS28]  129.03,50.88 90 top
U$128  [VIO29]  82.55,51.31 0 top
U$129  [RX22]  82.55,53.85 0 top
U$130  [TX21]  82.55,56.39 0 top
U$131  [IO334]  88.39,35.81 90 top
U$132  [NET31]  83.41,33.53 0 top
U$133  [CHG33]  83.44,32 0 top
U$134  [PWR32]  83.26,30.48 0 top
U$135  [IOREF39]  102.11,9.78 90 top
U$136  [RTS28]  104.65,9.78 90 top
U$137  [3#3V41]  107.19,9.8 90 top
U$138  [5V42]  109.73,9.8 90 top
U$139  [GND3]  112.27,9.91 90 top
U$140  [GND3]  114.81,9.91 90 top
U$141  [VIN43]  117.35,9.8 90 top
U$142  [A044]  122.43,9.8 90 top
U$143  [A145]  124.97,9.8 90 top
U$144  [A246]  127.51,9.8 90 top
U$145  [A347]  130.05,9.8 90 top
U$146  [A448]  132.59,9.8 90 top
U$147  [A549]  135.13,9.8 90 top
U$148  [NANO50]  113.79,22.73 0 top
U$149  [SIM51]  114.48,21.59 0 top
U$150  [IOREF39]  110.62,14.86 0 bottom
U$151  [5V42]  112.27,13.21 0 bottom
U$152  [3#3V41]  107.44,13.21 0 bottom
U$153  [PWR32]  120.4,48.13 90 bottom
U$154  [RST40]  117.73,48.51 90 bottom
U$155  [516]  120.4,53.21 90 bottom
U$156  [615]  117.86,53.21 90 bottom
U$157  [DTR24]  122.55,50.55 90 bottom
U$158  [RTS28]  129.92,48.64 90 bottom
U$159  [VUSB_DET52]  99.06,13.21 0 bottom
U$160  [A549]  135.13,9.8 90 bottom
U$161  [A448]  132.59,9.8 90 bottom
U$162  [A347]  130.05,9.8 90 bottom
U$163  [A246]  127.51,9.8 90 bottom
U$164  [A145]  124.97,9.8 90 bottom
U$165  [A044]  122.43,9.8 90 bottom
U$166  [VIN43]  117.35,9.8 90 bottom
U$167  [GND3]  114.81,9.91 90 bottom
U$168  [GND3]  112.27,9.91 90 bottom
U$169  [5V42]  109.73,9.8 90 bottom
U$170  [3#3V41]  109.07,10.92 0 bottom
U$171  [RTS28]  104.65,9.78 90 bottom
U$172  [IOREF39]  102.11,9.78 90 bottom
U$173  [IO334]  88.39,35.81 90 bottom
U$174  [TX21]  85.47,56.39 0 bottom
U$175  [RX22]  85.34,53.85 0 bottom
U$176  [VIO29]  85.85,51.31 0 bottom
U$177  [SDA1]  95,56.13 0 bottom
U$178  [SCL0]  92.33,56.13 0 bottom
U$179  [AREF2]  95.76,57.15 270 bottom
U$180  [134]  102.11,56.13 0 bottom
U$181  [GND3]  100.2,56.13 0 bottom
U$182  [125]  104.52,56.13 0 bottom
U$183  [116]  107.19,56.13 0 bottom
U$184  [107]  109.73,56.13 0 bottom
U$185  [98]  111.89,56.13 0 bottom
U$186  [89]  114.43,56.13 0 bottom
U$187  [714]  118.36,56.13 0 bottom
U$188  [615]  120.9,56.13 0 bottom
U$189  [516]  123.44,56.13 0 bottom
U$190  [417]  125.98,56.13 0 bottom
U$191  [318]  128.65,56.13 0 bottom
U$192  [219]  131.06,56.13 0 bottom
U$193  [TX21]  134.11,56.13 0 bottom
U$194  [RX22]  136.53,56.13 0 bottom
U$195  [GND3]  82.55,46.23 0 top
U$196  [GND3]  86.23,46.23 0 bottom
U$197  [LTE_CAT_M1#NB_IOT_SHIELD55]  114.81,18.29 0 top
U$198  [SARA#R410M#02B54]  118.36,16.38 0 top
U$199  [SOFT#HARD50]  113.79,54.1 0 top
U$200  [SERIAL57]  115.19,55.12 0 top
U$201  [POWER49]  96.77,54.36 0 top
U$202  [RESET48]  90.8,54.36 0 top
U$203  [GPS47]  87.12,39.37 90 top
U$204  [ARDUINO51]  89.53,7.49 90 top
U$205  [SHIELD52]  97.92,8.13 90 top
U$206  [PWR#SEL53]  90.68,14.86 0 top
U$207  [SCL0]  17.91,109.98 0 top
U$208  [SDA1]  20.45,109.98 0 top
U$209  [AREF2]  25.02,111.12 270 top
U$210  [GND3]  25.4,109.98 0 top
U$211  [134]  28.45,109.98 0 top
U$212  [125]  31.11,109.98 0 top
U$213  [116]  33.53,109.98 0 top
U$214  [107]  36.2,109.98 0 top
U$215  [98]  38.86,109.98 0 top
U$216  [89]  41.4,109.98 0 top
U$217  [714]  45.34,110.11 0 top
U$218  [615]  47.75,110.11 0 top
U$219  [516]  50.42,109.98 0 top
U$220  [417]  52.83,109.98 0 top
U$221  [318]  55.25,109.98 0 top
U$222  [219]  57.91,109.98 0 top
U$223  [RX22]  62.61,109.98 0 top
U$224  [TX21]  60.07,109.98 0 top
U$225  [CTS23]  52.35,104.6 90 top
U$226  [DTR24]  52.35,102.18 90 top
U$227  [RI25]  52.35,100.15 90 top
U$228  [DSR26]  57.91,99.64 90 top
U$229  [DCD27]  57.91,102.18 90 top
U$230  [RTS28]  57.91,104.72 90 top
U$231  [VIO29]  11.43,105.16 0 top
U$232  [RX22]  11.43,107.7 0 top
U$233  [TX21]  11.43,110.24 0 top
U$234  [IO334]  17.27,89.66 90 top
U$235  [NET31]  12.29,87.38 0 top
U$236  [CHG33]  12.32,85.85 0 top
U$237  [PWR32]  12.14,84.33 0 top
U$238  [IOREF39]  30.99,63.63 90 top
U$239  [RTS28]  33.53,63.63 90 top
U$240  [3#3V41]  36.07,63.65 90 top
U$241  [5V42]  38.61,63.65 90 top
U$242  [GND3]  41.15,63.75 90 top
U$243  [GND3]  43.69,63.75 90 top
U$244  [VIN43]  46.23,63.65 90 top
U$245  [A044]  51.31,63.65 90 top
U$246  [A145]  53.85,63.65 90 top
U$247  [A246]  56.39,63.65 90 top
U$248  [A347]  58.93,63.65 90 top
U$249  [A448]  61.47,63.65 90 top
U$250  [A549]  64.01,63.65 90 top
U$251  [NANO50]  42.67,76.58 0 top
U$252  [SIM51]  43.36,75.44 0 top
U$253  [IOREF39]  39.5,68.71 0 bottom
U$254  [5V42]  41.15,67.06 0 bottom
U$255  [3#3V41]  36.32,67.06 0 bottom
U$256  [PWR32]  49.28,101.98 90 bottom
U$257  [RST40]  46.61,102.36 90 bottom
U$258  [516]  49.28,107.06 90 bottom
U$259  [615]  46.74,107.06 90 bottom
U$260  [DTR24]  51.44,104.39 90 bottom
U$261  [RTS28]  58.8,102.49 90 bottom
U$262  [VUSB_DET52]  27.94,67.06 0 bottom
U$263  [A549]  64.01,63.65 90 bottom
U$264  [A448]  61.47,63.65 90 bottom
U$265  [A347]  58.93,63.65 90 bottom
U$266  [A246]  56.39,63.65 90 bottom
U$267  [A145]  53.85,63.65 90 bottom
U$268  [A044]  51.31,63.65 90 bottom
U$269  [VIN43]  46.23,63.65 90 bottom
U$270  [GND3]  43.69,63.75 90 bottom
U$271  [GND3]  41.15,63.75 90 bottom
U$272  [5V42]  38.61,63.65 90 bottom
U$273  [3#3V41]  37.95,64.77 0 bottom
U$274  [RTS28]  33.53,63.63 90 bottom
U$275  [IOREF39]  30.99,63.63 90 bottom
U$276  [IO334]  17.27,89.66 90 bottom
U$277  [TX21]  14.35,110.24 0 bottom
U$278  [RX22]  14.22,107.7 0 bottom
U$279  [VIO29]  14.73,105.16 0 bottom
U$280  [SDA1]  23.88,109.98 0 bottom
U$281  [SCL0]  21.21,109.98 0 bottom
U$282  [AREF2]  24.64,111 270 bottom
U$283  [134]  30.99,109.98 0 bottom
U$284  [GND3]  29.08,109.98 0 bottom
U$285  [125]  33.4,109.98 0 bottom
U$286  [116]  36.07,109.98 0 bottom
U$287  [107]  38.61,109.98 0 bottom
U$288  [98]  40.77,109.98 0 bottom
U$289  [89]  43.31,109.98 0 bottom
U$290  [714]  47.24,109.98 0 bottom
U$291  [615]  49.78,109.98 0 bottom
U$292  [516]  52.32,109.98 0 bottom
U$293  [417]  54.86,109.98 0 bottom
U$294  [318]  57.53,109.98 0 bottom
U$295  [219]  59.94,109.98 0 bottom
U$296  [TX21]  62.99,109.98 0 bottom
U$297  [RX22]  65.41,109.98 0 bottom
U$298  [GND3]  11.43,100.08 0 top
U$299  [GND3]  15.11,100.08 0 bottom
U$300  [LTE_CAT_M1#NB_IOT_SHIELD55]  43.69,72.14 0 top
U$301  [SARA#R410M#02B54]  47.24,70.23 0 top
U$302  [SOFT#HARD50]  42.67,107.95 0 top
U$303  [SERIAL57]  44.07,108.97 0 top
U$304  [POWER49]  25.65,108.2 0 top
U$305  [RESET48]  19.69,108.2 0 top
U$306  [GPS47]  16,93.22 90 top
U$307  [ARDUINO51]  18.41,61.34 90 top
U$308  [SHIELD52]  26.8,61.98 90 top
U$309  [PWR#SEL53]  19.56,68.71 0 top
U$310  [SCL0]  89.03,109.98 0 top
U$311  [SDA1]  91.57,109.98 0 top
U$312  [AREF2]  96.14,111.12 270 top
U$313  [GND3]  96.52,109.98 0 top
U$314  [134]  99.57,109.98 0 top
U$315  [125]  102.23,109.98 0 top
U$316  [116]  104.65,109.98 0 top
U$317  [107]  107.31,109.98 0 top
U$318  [98]  109.98,109.98 0 top
U$319  [89]  112.52,109.98 0 top
U$320  [714]  116.46,110.11 0 top
U$321  [615]  118.87,110.11 0 top
U$322  [516]  121.54,109.98 0 top
U$323  [417]  123.95,109.98 0 top
U$324  [318]  126.36,109.98 0 top
U$325  [219]  129.03,109.98 0 top
U$326  [RX22]  133.73,109.98 0 top
U$327  [TX21]  131.19,109.98 0 top
U$328  [CTS23]  123.47,104.6 90 top
U$329  [DTR24]  123.47,102.18 90 top
U$330  [RI25]  123.47,100.15 90 top
U$331  [DSR26]  129.03,99.64 90 top
U$332  [DCD27]  129.03,102.18 90 top
U$333  [RTS28]  129.03,104.72 90 top
U$334  [VIO29]  82.55,105.16 0 top
U$335  [RX22]  82.55,107.7 0 top
U$336  [TX21]  82.55,110.24 0 top
U$337  [IO334]  88.39,89.66 90 top
U$338  [NET31]  83.41,87.38 0 top
U$339  [CHG33]  83.44,85.85 0 top
U$340  [PWR32]  83.26,84.33 0 top
U$341  [IOREF39]  102.11,63.63 90 top
U$342  [RTS28]  104.65,63.63 90 top
U$343  [3#3V41]  107.19,63.65 90 top
U$344  [5V42]  109.73,63.65 90 top
U$345  [GND3]  112.27,63.75 90 top
U$346  [GND3]  114.81,63.75 90 top
U$347  [VIN43]  117.35,63.65 90 top
U$348  [A044]  122.43,63.65 90 top
U$349  [A145]  124.97,63.65 90 top
U$350  [A246]  127.51,63.65 90 top
U$351  [A347]  130.05,63.65 90 top
U$352  [A448]  132.59,63.65 90 top
U$353  [A549]  135.13,63.65 90 top
U$354  [NANO50]  113.79,76.58 0 top
U$355  [SIM51]  114.48,75.44 0 top
U$356  [IOREF39]  110.62,68.71 0 bottom
U$357  [5V42]  112.27,67.06 0 bottom
U$358  [3#3V41]  107.44,67.06 0 bottom
U$359  [PWR32]  120.4,101.98 90 bottom
U$360  [RST40]  117.73,102.36 90 bottom
U$361  [516]  120.4,107.06 90 bottom
U$362  [615]  117.86,107.06 90 bottom
U$363  [DTR24]  122.55,104.39 90 bottom
U$364  [RTS28]  129.92,102.49 90 bottom
U$365  [VUSB_DET52]  99.06,67.06 0 bottom
U$366  [A549]  135.13,63.65 90 bottom
U$367  [A448]  132.59,63.65 90 bottom
U$368  [A347]  130.05,63.65 90 bottom
U$369  [A246]  127.51,63.65 90 bottom
U$370  [A145]  124.97,63.65 90 bottom
U$371  [A044]  122.43,63.65 90 bottom
U$372  [VIN43]  117.35,63.65 90 bottom
U$373  [GND3]  114.81,63.75 90 bottom
U$374  [GND3]  112.27,63.75 90 bottom
U$375  [5V42]  109.73,63.65 90 bottom
U$376  [3#3V41]  109.07,64.77 0 bottom
U$377  [RTS28]  104.65,63.63 90 bottom
U$378  [IOREF39]  102.11,63.63 90 bottom
U$379  [IO334]  88.39,89.66 90 bottom
U$380  [TX21]  85.47,110.24 0 bottom
U$381  [RX22]  85.34,107.7 0 bottom
U$382  [VIO29]  85.85,105.16 0 bottom
U$383  [SDA1]  95,109.98 0 bottom
U$384  [SCL0]  92.33,109.98 0 bottom
U$385  [AREF2]  95.76,111 270 bottom
U$386  [134]  102.11,109.98 0 bottom
U$387  [GND3]  100.2,109.98 0 bottom
U$388  [125]  104.52,109.98 0 bottom
U$389  [116]  107.19,109.98 0 bottom
U$390  [107]  109.73,109.98 0 bottom
U$391  [98]  111.89,109.98 0 bottom
U$392  [89]  114.43,109.98 0 bottom
U$393  [714]  118.36,109.98 0 bottom
U$394  [615]  120.9,109.98 0 bottom
U$395  [516]  123.44,109.98 0 bottom
U$396  [417]  125.98,109.98 0 bottom
U$397  [318]  128.65,109.98 0 bottom
U$398  [219]  131.06,109.98 0 bottom
U$399  [TX21]  134.11,109.98 0 bottom
U$400  [RX22]  136.53,109.98 0 bottom
U$401  [GND3]  82.55,100.08 0 top
U$402  [GND3]  86.23,100.08 0 bottom
U$403  [LTE_CAT_M1#NB_IOT_SHIELD55]  114.81,72.14 0 top
U$404  [SARA#R410M#02B54]  118.36,70.23 0 top
U$405  [SOFT#HARD50]  113.79,107.95 0 top
U$406  [SERIAL57]  115.19,108.97 0 top
U$407  [POWER49]  96.77,108.2 0 top
U$408  [RESET48]  90.8,108.2 0 top
U$409  [GPS47]  87.12,93.22 90 top
U$410  [ARDUINO51]  89.53,61.34 90 top
U$411  [SHIELD52]  97.92,61.98 90 top
U$412  [PWR#SEL53]  90.68,68.71 0 top

## Library data of the parts
B1-B4 = SparkFun-Boards
C1 C3 C8 C13 C24 C25 C30 C34 C44 C45 C50 C54 C64 C65 C70 C74 = SparkFun-Capacitors; PROD_ID: CAP-00810
C2 C4 C39 C40 C59 C60 C79 C80 = SparkFun-Capacitors; PROD_ID: CAP-00868
C5-C7 C21-C23 C41-C43 C61-C63 = SparkFun-Capacitors; PROD_ID: CAP-08280
C9 C35 C55 C75 = SparkFun-Capacitors; PROD_ID: CAP-00867
C10 C15 C32 C36 C52 C56 C72 C76 = SparkFun-Capacitors; PROD_ID: CAP-07881
C11 C12 C37 C38 C57 C58 C77 C78 D5 D7 D11 D12 D17 D18 D23 D24 E1-E4 J8 J14 J23 J32 L1-L8 U4-U6 U8 U11 U13 U16 U18 = ublox
C14 C16 C18 C19 C26-C29 C46-C49 C66-C69 = SparkFun-Capacitors; PROD_ID: CAP-08913
C17 C31 C51 C71 = SparkFun-Capacitors; PROD_ID: CAP-09989
C20 C33 C53 C73 = SparkFun-Capacitors; PROD_ID: CAP-10142
D1 D8 D14 D20 = SparkFun-LED; PROD_ID: DIO-09003
D2 D6 D13 D19 = SparkFun-DiscreteSemi; PROD_ID: DIO-11623
D3 D10 D16 D22 = SparkFun-LED; PROD_ID: DIO-00819
D4 D9 D15 D21 = SparkFun-LED; PROD_ID: DIO-08575
E$1-E$4 FD1-FD16 LOGO2 LOGO4 LOGO6 LOGO8 = SparkFun-Aesthetics
E$5 E$6 = SparkFun-Retired
H1-H12 = SparkFun-Hardware
J1 J10 J19 J28 = SparkFun-Connectors; PROD_ID: CONN-13711
J2 J12 J21 J30 = SparkFun-Connectors; PROD_ID: CONN-11443; SF_ID: PRT-08612
J3 J11 J20 J29 = SparkFun-Connectors; PROD_ID: CONN-13694
J4-J7 J13 J16-J18 J22 J25-J27 J31 J34-J36 = SparkFun-Connectors
J9 J15 J24 J33 = SparkFun-Connectors; PROD_ID: CONN-09193; SF_ID: WRL-09144
JP1-JP32 = SparkFun-Jumpers
LOGO1 LOGO3 LOGO5 LOGO7 = SparkX
Q1 Q3 Q5 Q7 = SparkFun-DiscreteSemi; PROD_ID: TRANS-11308
Q2 Q4 Q6 Q8 = SparkFun-DiscreteSemi; PROD_ID: TRANS-08049
R1 R16 R24 R32 = SparkFun-Resistors; PROD_ID: RES-07871
R2 R6 R8 R10 R14 R15 R18 R22 R23 R26 R30 R31 = SparkFun-Resistors; PROD_ID: RES-07856
R3 R11 R19 R27 = SparkFun-Resistors; PROD_ID: RES-08296
R4 R5 R7 R9 R12 R13 R17 R20 R21 R25 R28 R29 = SparkFun-Resistors; PROD_ID: RES-00824
S1 S2 S7 S8 S11 S12 S15 S16 = SparkFun-Switches; PROD_ID: SWCH-08179; SF_SKU: COM-00597
S3-S6 S9 S10 S13 S14 = SparkFun-Switches; PROD_ID: SWCH-08247; SF_SKU: COM-08720
U1 U9 U14 U19 = SparkFun-IC-Comms; PROD_ID: IC-11329
U2 U10 U15 U20 = SparkFun-IC-Power; PROD_ID: VREG-12457
U3 U7 U12 U17 = SparkFun-PowerIC; PROD_ID: IC-09995
U$1-U$412 = buzzard_labels

## Nets
1.8V: C1.1 U1.1 U1.8 U5.4
1.8V1: C24.1 U6.4 U9.1 U9.8
1.8V2: C44.1 U11.4 U14.1 U14.8
1.8V3: C64.1 U16.4 U19.1 U19.8
3.3V: C2.1 C7.1 C8.1 C9.1 C10.1 C11.1 C12.1 D4.A R6.2 U2.1 U4.1 U5.51 U5.52 U5.53
3.3V1: C23.1 C34.1 C35.1 C36.1 C37.1 C38.1 C39.1 D9.A R15.2 U6.51 U6.52 U6.53 U8.1 U10.1
3.3V2: C43.1 C54.1 C55.1 C56.1 C57.1 C58.1 C59.1 D15.A R23.2 U11.51 U11.52 U11.53 U13.1 U15.1
3.3V3: C63.1 C74.1 C75.1 C76.1 C77.1 C78.1 C79.1 D21.A R31.2 U16.51 U16.52 U16.53 U18.1 U20.1
ANT: C15.1 U5.56
ANT1: C32.1 U6.56
ANT2: C52.1 U11.56
ANT3: C72.1 U16.56
ANT_DET: R9.1 U5.62
ANT_DET1: R12.1 U6.62
ANT_DET2: R20.1 U11.62
ANT_DET3: R28.1 U16.62
ARDUINO-3.3V: B1.3.3V JP2.3
ARDUINO-3.3V1: B2.3.3V JP12.3
ARDUINO-3.3V2: B3.3.3V JP20.3
ARDUINO-3.3V3: B4.3.3V JP28.3
ARDUINO-5V: B1.5V JP2.1 S2.2 S2.5
ARDUINO-5V1: B2.5V JP12.1 S7.2 S7.5
ARDUINO-5V2: B3.5V JP20.1 S11.2 S11.5
ARDUINO-5V3: B4.5V JP28.1 S15.2 S15.5
CTS: J7.3 U5.11
CTS1: J17.3 U6.11
CTS2: J26.3 U11.11
CTS3: J35.3 U16.11
D+ [USB_Data]: D5.6 U5.28
D+1 [USB_Data]: D11.6 U6.28
D+2 [USB_Data]: D17.6 U11.28
D+3 [USB_Data]: D23.6 U16.28
D- [USB_Data]: D5.4 U5.29
D-1 [USB_Data]: D11.4 U6.29
D-2 [USB_Data]: D17.4 U11.29
D-3 [USB_Data]: D23.4 U16.29
DCD: J6.2 U5.8
DCD1: J16.2 U6.8
DCD2: J25.2 U11.8
DCD3: J34.2 U16.8
DSR: J6.1 U5.6
DSR1: J16.1 U6.6
DSR2: J25.1 U11.6
DSR3: J34.1 U16.6
DTR: J7.2 JP6.2 U5.9
DTR1: J17.2 JP13.2 U6.9
DTR2: J26.2 JP21.2 U11.9
DTR3: J35.2 JP29.2 U16.9
GND: B1.AREF B1.GND@0 B1.GND@1 B1.GND@2 C1.2 C2.2 C3.2 C4.2 C5.2 C6.2 C7.2 C8.2 C9.2 C10.2 C11.2 C12.2 C13.2 C14.2 C16.2 C17.2 C18.2 C19.2 D3.C D5.2 D7.2 D7.5 E1.GND J1.GND J2.1 J3.1 J5.6 J8.C5 J9.1 J9.2 JP5.1 JP6.1 L1.1 Q2.2 R1.1 R3.1 R5.1 S3.1 S3.2 S4.1 S4.2 U1.7 U2.2 U3.2 U4.4 U4.EP U5.1 U5.3 U5.5 U5.14 U5.20 U5.21 U5.22 U5.30 U5.32 U5.33 U5.43 U5.50 U5.54 U5.55 U5.57 U5.58 U5.59 U5.60 U5.61 U5.63 U5.64 U5.65 U5.66 U5.67 U5.68 U5.69 U5.70 U5.71 U5.72 U5.73 U5.74 U5.75 U5.76 U5.77 U5.78 U5.79 U5.80 U5.81 U5.82 U5.83 U5.84 U5.85 U5.86 U5.87 U5.88 U5.89 U5.90 U5.91 U5.92 U5.93 U5.94 U5.95 U5.96
GND1: B2.AREF B2.GND@0 B2.GND@1 B2.GND@2 C21.2 C22.2 C23.2 C24.2 C25.2 C26.2 C27.2 C28.2 C29.2 C30.2 C31.2 C34.2 C35.2 C36.2 C37.2 C38.2 C39.2 C40.2 D10.C D11.2 D12.2 D12.5 E2.GND J10.GND J11.1 J12.1 J13.6 J14.C5 J15.1 J15.2 JP13.1 JP14.1 L3.1 Q4.2 R4.1 R11.1 R16.1 S5.1 S5.2 S6.1 S6.2 U6.1 U6.3 U6.5 U6.14 U6.20 U6.21 U6.22 U6.30 U6.32 U6.33 U6.43 U6.50 U6.54 U6.55 U6.57 U6.58 U6.59 U6.60 U6.61 U6.63 U6.64 U6.65 U6.66 U6.67 U6.68 U6.69 U6.70 U6.71 U6.72 U6.73 U6.74 U6.75 U6.76 U6.77 U6.78 U6.79 U6.80 U6.81 U6.82 U6.83 U6.84 U6.85 U6.86 U6.87 U6.88 U6.89 U6.90 U6.91 U6.92 U6.93 U6.94 U6.95 U6.96 U7.2 U8.4 U8.EP U9.7 U10.2
GND2: B3.AREF B3.GND@0 B3.GND@1 B3.GND@2 C41.2 C42.2 C43.2 C44.2 C45.2 C46.2 C47.2 C48.2 C49.2 C50.2 C51.2 C54.2 C55.2 C56.2 C57.2 C58.2 C59.2 C60.2 D16.C D17.2 D18.2 D18.5 E3.GND J19.GND J20.1 J21.1 J22.6 J23.C5 J24.1 J24.2 JP21.1 JP22.1 L5.1 Q6.2 R17.1 R19.1 R24.1 S9.1 S9.2 S10.1 S10.2 U11.1 U11.3 U11.5 U11.14 U11.20 U11.21 U11.22 U11.30 U11.32 U11.33 U11.43 U11.50 U11.54 U11.55 U11.57 U11.58 U11.59 U11.60 U11.61 U11.63 U11.64 U11.65 U11.66 U11.67 U11.68 U11.69 U11.70 U11.71 U11.72 U11.73 U11.74 U11.75 U11.76 U11.77 U11.78 U11.79 U11.80 U11.81 U11.82 U11.83 U11.84 U11.85 U11.86 U11.87 U11.88 U11.89 U11.90 U11.91 U11.92 U11.93 U11.94 U11.95 U11.96 U12.2 U13.4 U13.EP U14.7 U15.2
GND3: B4.AREF B4.GND@0 B4.GND@1 B4.GND@2 C61.2 C62.2 C63.2 C64.2 C65.2 C66.2 C67.2 C68.2 C69.2 C70.2 C71.2 C74.2 C75.2 C76.2 C77.2 C78.2 C79.2 C80.2 D22.C D23.2 D24.2 D24.5 E4.GND J28.GND J29.1 J30.1 J31.6 J32.C5 J33.1 J33.2 JP29.1 JP30.1 L7.1 Q8.2 R25.1 R27.1 R32.1 S13.1 S13.2 S14.1 S14.2 U16.1 U16.3 U16.5 U16.14 U16.20 U16.21 U16.22 U16.30 U16.32 U16.33 U16.43 U16.50 U16.54 U16.55 U16.57 U16.58 U16.59 U16.60 U16.61 U16.63 U16.64 U16.65 U16.66 U16.67 U16.68 U16.69 U16.70 U16.71 U16.72 U16.73 U16.74 U16.75 U16.76 U16.77 U16.78 U16.79 U16.80 U16.81 U16.82 U16.83 U16.84 U16.85 U16.86 U16.87 U16.88 U16.89 U16.90 U16.91 U16.92 U16.93 U16.94 U16.95 U16.96 U17.2 U18.4 U18.EP U19.7 U20.2
GPIO1: R7.2 U5.16
GPIO2: R1.2 U2.3 U5.23
GPIO3: J4.1 U5.24
GPIO4: R13.2 U6.16
GPIO5: R16.2 U6.23 U10.3
GPIO6: J18.1 U6.24
GPIO7: R21.2 U11.16
GPIO8: R24.2 U11.23 U15.3
GPIO9: J27.1 U11.24
GPIO10: R29.2 U16.16
GPIO11: R32.2 U16.23 U20.3
GPIO12: J36.1 U16.24
GPS-3.3V: C4.1 J3.2 U2.5
GPS-3.3V1: C40.1 J11.2 U10.5
GPS-3.3V2: C60.1 J20.2 U15.5
GPS-3.3V3: C80.1 J29.2 U20.5
HARDRX-ARDUINO: B1.RX S1.1
HARDRX-ARDUINO1: B2.RX S8.1
HARDRX-ARDUINO2: B3.RX S12.1
HARDRX-ARDUINO3: B4.RX S16.1
HARDTX-ARDUINO: B1.TX S1.4
HARDTX-ARDUINO1: B2.TX S8.4
HARDTX-ARDUINO2: B3.TX S12.4
HARDTX-ARDUINO3: B4.TX S16.4
IOREF: B1.IOREF C3.1 J5.4 JP2.2 U1.14
IOREF1: B2.IOREF C25.1 J13.4 JP12.2 U9.14
IOREF2: B3.IOREF C45.1 J22.4 JP20.2 U14.14
IOREF3: B4.IOREF C65.1 J31.4 JP28.2 U19.14
N$1: R3.2 U3.5
N$2: D8.C R10.2
N$3: R10.1 U7.1
N$4: R11.2 U7.5
N$5: C31.1 L4.2 R12.2
N$6: C32.2 C33.1 L3.2
N$7: C17.1 L2.2 R9.2
N$8: C15.2 C20.1 L1.2
N$9: J9.FEED JP9.2
N$10: Q2.1 R7.1
N$12: D5.1 J1.D-
N$13: D4.C R8.2
N$14: D5.3 J1.D+
N$15: Q2.3 R8.1
N$16: D3.A R6.1
N$17: D1.C R2.2
N$18: R2.1 U3.1
N$19: B1.D5 JP3.1
N$20: B1.D6 JP4.1
N$21: C20.2 JP8.1 JP9.1 L2.1
N$22: E1.FEED JP8.2
N$23: J15.FEED JP15.2
N$24: Q4.1 R13.1
N$25: D10.A R15.1
N$26: D9.C R14.2
N$27: Q4.3 R14.1
N$28: B2.D5 JP11.1
N$29: B2.D6 JP10.1
N$30: C33.2 JP15.1 JP16.1 L4.1
N$31: E2.FEED JP16.2
N$33: D11.1 J10.D-
N$34: D11.3 J10.D+
N$35: D14.C R18.2
N$36: R18.1 U12.1
N$37: R19.2 U12.5
N$38: C51.1 L6.2 R20.2
N$39: C52.2 C53.1 L5.2
N$40: J24.FEED JP23.2
N$41: Q6.1 R21.1
N$42: D16.A R23.1
N$43: D15.C R22.2
N$44: Q6.3 R22.1
N$45: B3.D5 JP19.1
N$46: B3.D6 JP18.1
N$47: C53.2 JP23.1 JP24.1 L6.1
N$48: E3.FEED JP24.2
N$50: D17.1 J19.D-
N$51: D17.3 J19.D+
N$52: D20.C R26.2
N$53: R26.1 U17.1
N$54: R27.2 U17.5
N$55: C71.1 L8.2 R28.2
N$56: C72.2 C73.1 L7.2
N$57: J33.FEED JP31.2
N$58: Q8.1 R29.1
N$59: D22.A R31.1
N$60: D21.C R30.2
N$61: Q8.3 R30.1
N$62: B4.D5 JP27.1
N$63: B4.D6 JP26.1
N$64: C73.2 JP31.1 JP32.1 L8.1
N$65: E4.FEED JP32.2
N$67: D23.1 J28.D-
N$68: D23.3 J28.D+
PWR_ON: JP3.2 S3.3 S3.4 U5.15
PWR_ON1: JP11.2 S5.3 S5.4 U6.15
PWR_ON2: JP19.2 S9.3 S9.4 U11.15
PWR_ON3: JP27.2 S13.3 S13.4 U16.15
RESET_N: JP4.2 S4.3 S4.4 U5.18
RESET_N1: JP10.2 S6.3 S6.4 U6.18
RESET_N2: JP18.2 S10.3 S10.4 U11.18
RESET_N3: JP26.2 S14.3 S14.4 U16.18
RI: J7.1 U5.7
RI1: J17.1 U6.7
RI2: J26.1 U11.7
RI3: J35.1 U16.7
RTS: J6.3 JP5.2 U5.10
RTS1: J16.3 JP14.2 U6.10
RTS2: J25.3 JP22.2 U11.10
RTS3: J34.3 JP30.2 U16.10
RX-ARDUINO: J5.2 S1.2 U1.11
RX-ARDUINO1: J13.2 S8.2 U9.11
RX-ARDUINO2: J22.2 S12.2 U14.11
RX-ARDUINO3: J31.2 S16.2 U19.11
RX-CELL: U1.5 U5.12
RX-CELL1: U6.12 U9.5
RX-CELL2: U11.12 U14.5
RX-CELL3: U16.12 U19.5
SCL-CELL: U1.2 U5.27
SCL-CELL1: U6.27 U9.2
SCL-CELL2: U11.27 U14.2
SCL-CELL3: U16.27 U19.2
SCL-QWIIC: J3.4 U1.13
SCL-QWIIC1: J11.4 U9.13
SCL-QWIIC2: J20.4 U14.13
SCL-QWIIC3: J29.4 U19.13
SDA-CELL: U1.3 U5.26
SDA-CELL1: U6.26 U9.3
SDA-CELL2: U11.26 U14.3
SDA-CELL3: U16.26 U19.3
SDA-QWIIC: J3.3 U1.12
SDA-QWIIC1: J11.3 U9.12
SDA-QWIIC2: J20.3 U14.12
SDA-QWIIC3: J29.3 U19.12
SHIELD: J1.SHIELD J1.SHIELD2 J1.SHIELD3 J1.SHIELD4 J1.SHIELD5 J1.SHIELD6 J1.SHIELD7 J1.SHIELD8 J1.SHIELD9 J1.SHIELD10
SHIELD1: J10.SHIELD J10.SHIELD2 J10.SHIELD3 J10.SHIELD4 J10.SHIELD5 J10.SHIELD6 J10.SHIELD7 J10.SHIELD8 J10.SHIELD9 J10.SHIELD10
SHIELD2: J19.SHIELD J19.SHIELD2 J19.SHIELD3 J19.SHIELD4 J19.SHIELD5 J19.SHIELD6 J19.SHIELD7 J19.SHIELD8 J19.SHIELD9 J19.SHIELD10
SHIELD3: J28.SHIELD J28.SHIELD2 J28.SHIELD3 J28.SHIELD4 J28.SHIELD5 J28.SHIELD6 J28.SHIELD7 J28.SHIELD8 J28.SHIELD9 J28.SHIELD10
SIM_CLK: C18.1 D7.6 J8.C3 U5.38
SIM_CLK1: C27.1 D12.6 J14.C3 U6.38
SIM_CLK2: C47.1 D18.6 J23.C3 U11.38
SIM_CLK3: C67.1 D24.6 J32.C3 U16.38
SIM_IO: C16.1 D7.4 J8.C7 U5.39
SIM_IO1: C28.1 D12.4 J14.C7 U6.39
SIM_IO2: C48.1 D18.4 J23.C7 U11.39
SIM_IO3: C68.1 D24.4 J32.C7 U16.39
SIM_RST: C19.1 D7.3 J8.C2 U5.40
SIM_RST1: C26.1 D12.3 J14.C2 U6.40
SIM_RST2: C46.1 D18.3 J23.C2 U11.40
SIM_RST3: C66.1 D24.3 J32.C2 U16.40
SOFTRX-ARDUINO: B1.D8 S1.3
SOFTRX-ARDUINO1: B2.D8 S8.3
SOFTRX-ARDUINO2: B3.D8 S12.3
SOFTRX-ARDUINO3: B4.D8 S16.3
SOFTTX-ARDUINO: B1.D9 S1.6
SOFTTX-ARDUINO1: B2.D9 S8.6
SOFTTX-ARDUINO2: B3.D9 S12.6
SOFTTX-ARDUINO3: B4.D9 S16.6
TX-ARDUINO: J5.3 S1.5 U1.10
TX-ARDUINO1: J13.3 S8.5 U9.10
TX-ARDUINO2: J22.3 S12.5 U14.10
TX-ARDUINO3: J31.3 S16.5 U19.10
TX-CELL: U1.4 U5.13
TX-CELL1: U6.13 U9.4
TX-CELL2: U11.13 U14.4
TX-CELL3: U16.13 U19.4
V_BATT: C5.1 J2.2 Q1.3 U3.3
V_BATT1: C21.1 J12.2 Q3.3 U7.3
V_BATT2: C41.1 J21.2 Q5.3 U12.3
V_BATT3: C61.1 J30.2 Q7.3 U17.3
V_USB: D1.A D2.A D5.5 J1.VBUS JP7.1 Q1.1 R5.2 S2.3 S2.6 U3.4
V_USB1: D6.A D8.A D11.5 J10.VBUS JP1.1 Q3.1 R4.2 S7.3 S7.6 U7.4
V_USB2: D13.A D14.A D17.5 J19.VBUS JP17.1 Q5.1 R17.2 S11.3 S11.6 U12.4
V_USB3: D19.A D20.A D23.5 J28.VBUS JP25.1 Q7.1 R25.2 S15.3 S15.6 U17.4
VIN: C6.1 D2.C Q1.2 S2.1 S2.4 U4.5 U4.8
VIN1: C22.1 D6.C Q3.2 S7.1 S7.4 U8.5 U8.8
VIN2: C42.1 D13.C Q5.2 S11.1 S11.4 U13.5 U13.8
VIN3: C62.1 D19.C Q7.2 S15.1 S15.4 U18.5 U18.8
VSIM: C13.1 C14.1 D7.1 J8.C1 U5.41
VSIM1: C29.1 C30.1 D12.1 J14.C1 U6.41
VSIM2: C49.1 C50.1 D18.1 J23.C1 U11.41
VSIM3: C69.1 C70.1 D24.1 J32.C1 U16.41
VUSB_DET: JP7.2 U5.17
VUSB_DET1: JP1.2 U6.17
VUSB_DET2: JP17.2 U11.17
VUSB_DET3: JP25.2 U16.17

## Tracks (layer width: path | path; a pad name or v marks a point on that pad's centre or on a via)
1.8V  (via drill 0.3)
  Top 0.152: U5.4 39.88,44.37 39.88,45.72 v39.98,45.82 | C1.1 32.1,47.24 v33.14,47.24 v33.15,47.24 U1.1 | U1.8 41.78,49.88 v41.59,49.69
  Bottom 0.152: 39.14,47.24 v33.14,47.24 | v41.59,49.69 39.14,47.24 | v39.98,45.82 39.14,46.65 39.14,47.24
1.8V1  (via drill 0.3)
  Top 0.152: U6.4 111,44.37 111,45.72 v111.09,45.82 | C24.1 103.22,47.24 v104.26,47.24 v104.27,47.24 U9.1 | U9.8 112.9,49.88 v112.71,49.69
  Bottom 0.152: 110.27,47.24 v104.26,47.24 | v112.71,49.69 110.27,47.24 | v111.09,45.82 110.27,46.65 110.27,47.24
1.8V2  (via drill 0.3)
  Top 0.152: U11.4 39.88,98.22 39.88,99.57 v39.98,99.67 | C44.1 32.1,101.09 v33.14,101.09 v33.15,101.09 U14.1 | U14.8 41.78,103.73 v41.59,103.54
  Bottom 0.152: 39.14,101.09 v33.14,101.09 | v41.59,103.54 39.14,101.09 | v39.98,99.67 39.14,100.5 39.14,101.09
1.8V3  (via drill 0.3)
  Top 0.152: U16.4 111,98.22 111,99.57 v111.09,99.67 | C64.1 103.22,101.09 v104.26,101.09 v104.27,101.09 U19.1 | U19.8 112.9,103.73 v112.71,103.54
  Bottom 0.152: 110.27,101.09 v104.26,101.09 | v112.71,103.54 110.27,101.09 | v111.09,99.67 110.27,100.5 110.27,101.09
3.3V  (via drill 0.3)
  Top 0.152: D4.A 11.11,34.21 v11.31,34.21 | R6.2 17.61,28.85 18.29,28.85
  Top 0.305: U4.1 C7.1 | 27.09,24.42 C12.1 27.3,24.51 | U5.51 41.06,29.72 | 42.16,28.87 42.42,28.87 | 43.26,28.87 43.69,28.87 | 14.99,47.24 14.99,45.21 16.3,43.9 16.3,41.23 v17.55,39.98 | 14.99,47.24 14.99,48.26 15.46,48.74 U2.1 | C2.1 14.99,47.24 | 41.06,28.87 41.15,28.87 | v19.56,28.85 18.29,28.85 17.26,28.85 v17,28.6
  Top 0.508: C7.1 27.09,24.42 | C11.1 C10.1 C9.1 C8.1 43.69,28.87 42.42,28.87 41.15,28.87 40.09,27.81 28.96,27.81 28.57,27.43 v28.57,25.78 27.3,24.51 | U5.52 42.16,28.87 | U5.53 43.26,28.87 | 41.06,29.72 41.06,28.87
  Bottom 0.152: v11.31,34.21 12.69,35.59 17,35.59 17,36.07
  Bottom 0.305: v28.57,25.78 27.15,27.21 22.9,27.21 21.25,28.85 v19.56,28.85 | v17.55,39.98 v17.56,39.97 17.56,37.08 17,36.52 17,36.07 v17,28.6
3.3V1  (via drill 0.3)
  Top 0.152: D9.A 82.23,34.21 v82.43,34.21 | R15.2 88.73,28.85 89.41,28.85
  Top 0.305: U8.1 C23.1 | 98.21,24.42 C38.1 98.42,24.51 | U6.51 112.18,29.72 | 113.28,28.87 113.54,28.87 | 114.38,28.87 114.81,28.87 | 86.11,47.24 86.11,45.21 87.42,43.9 87.42,41.23 v88.67,39.98 | 86.11,47.24 86.11,48.26 86.58,48.74 U10.1 | C39.1 86.11,47.24 | 112.18,28.87 112.27,28.87 | v90.68,28.85 89.41,28.85 88.38,28.85 v88.12,28.6
  Top 0.508: C23.1 98.21,24.42 | C37.1 C36.1 C35.1 C34.1 114.81,28.87 113.54,28.87 112.27,28.87 111.21,27.81 100.08,27.81 99.69,27.43 v99.69,25.78 98.42,24.51 | U6.52 113.28,28.87 | U6.53 114.38,28.87 | 112.18,29.72 112.18,28.87
  Bottom 0.152: v82.43,34.21 83.81,35.59 88.12,35.59 88.12,36.07